# Altium PCB 2009_DFMUX_MEZZANINE_REV4_TIMEMAIL.PCBDOC (part 1 of 6)
Units mil, origin at the board's own origin, x right, y up, seen from the top; angles counter-clockwise.
Board outline 4922.86 x 3627.76 mil, 6 copper layers (Top Layer, Internal Plane 1, Mid-Layer 1, Internal Plane 2, Mid-Layer 2, Bottom Layer); 519 components, 606 nets, 2175 pads, 757 vias.
Unrouted connection lines stored in the file: 148.
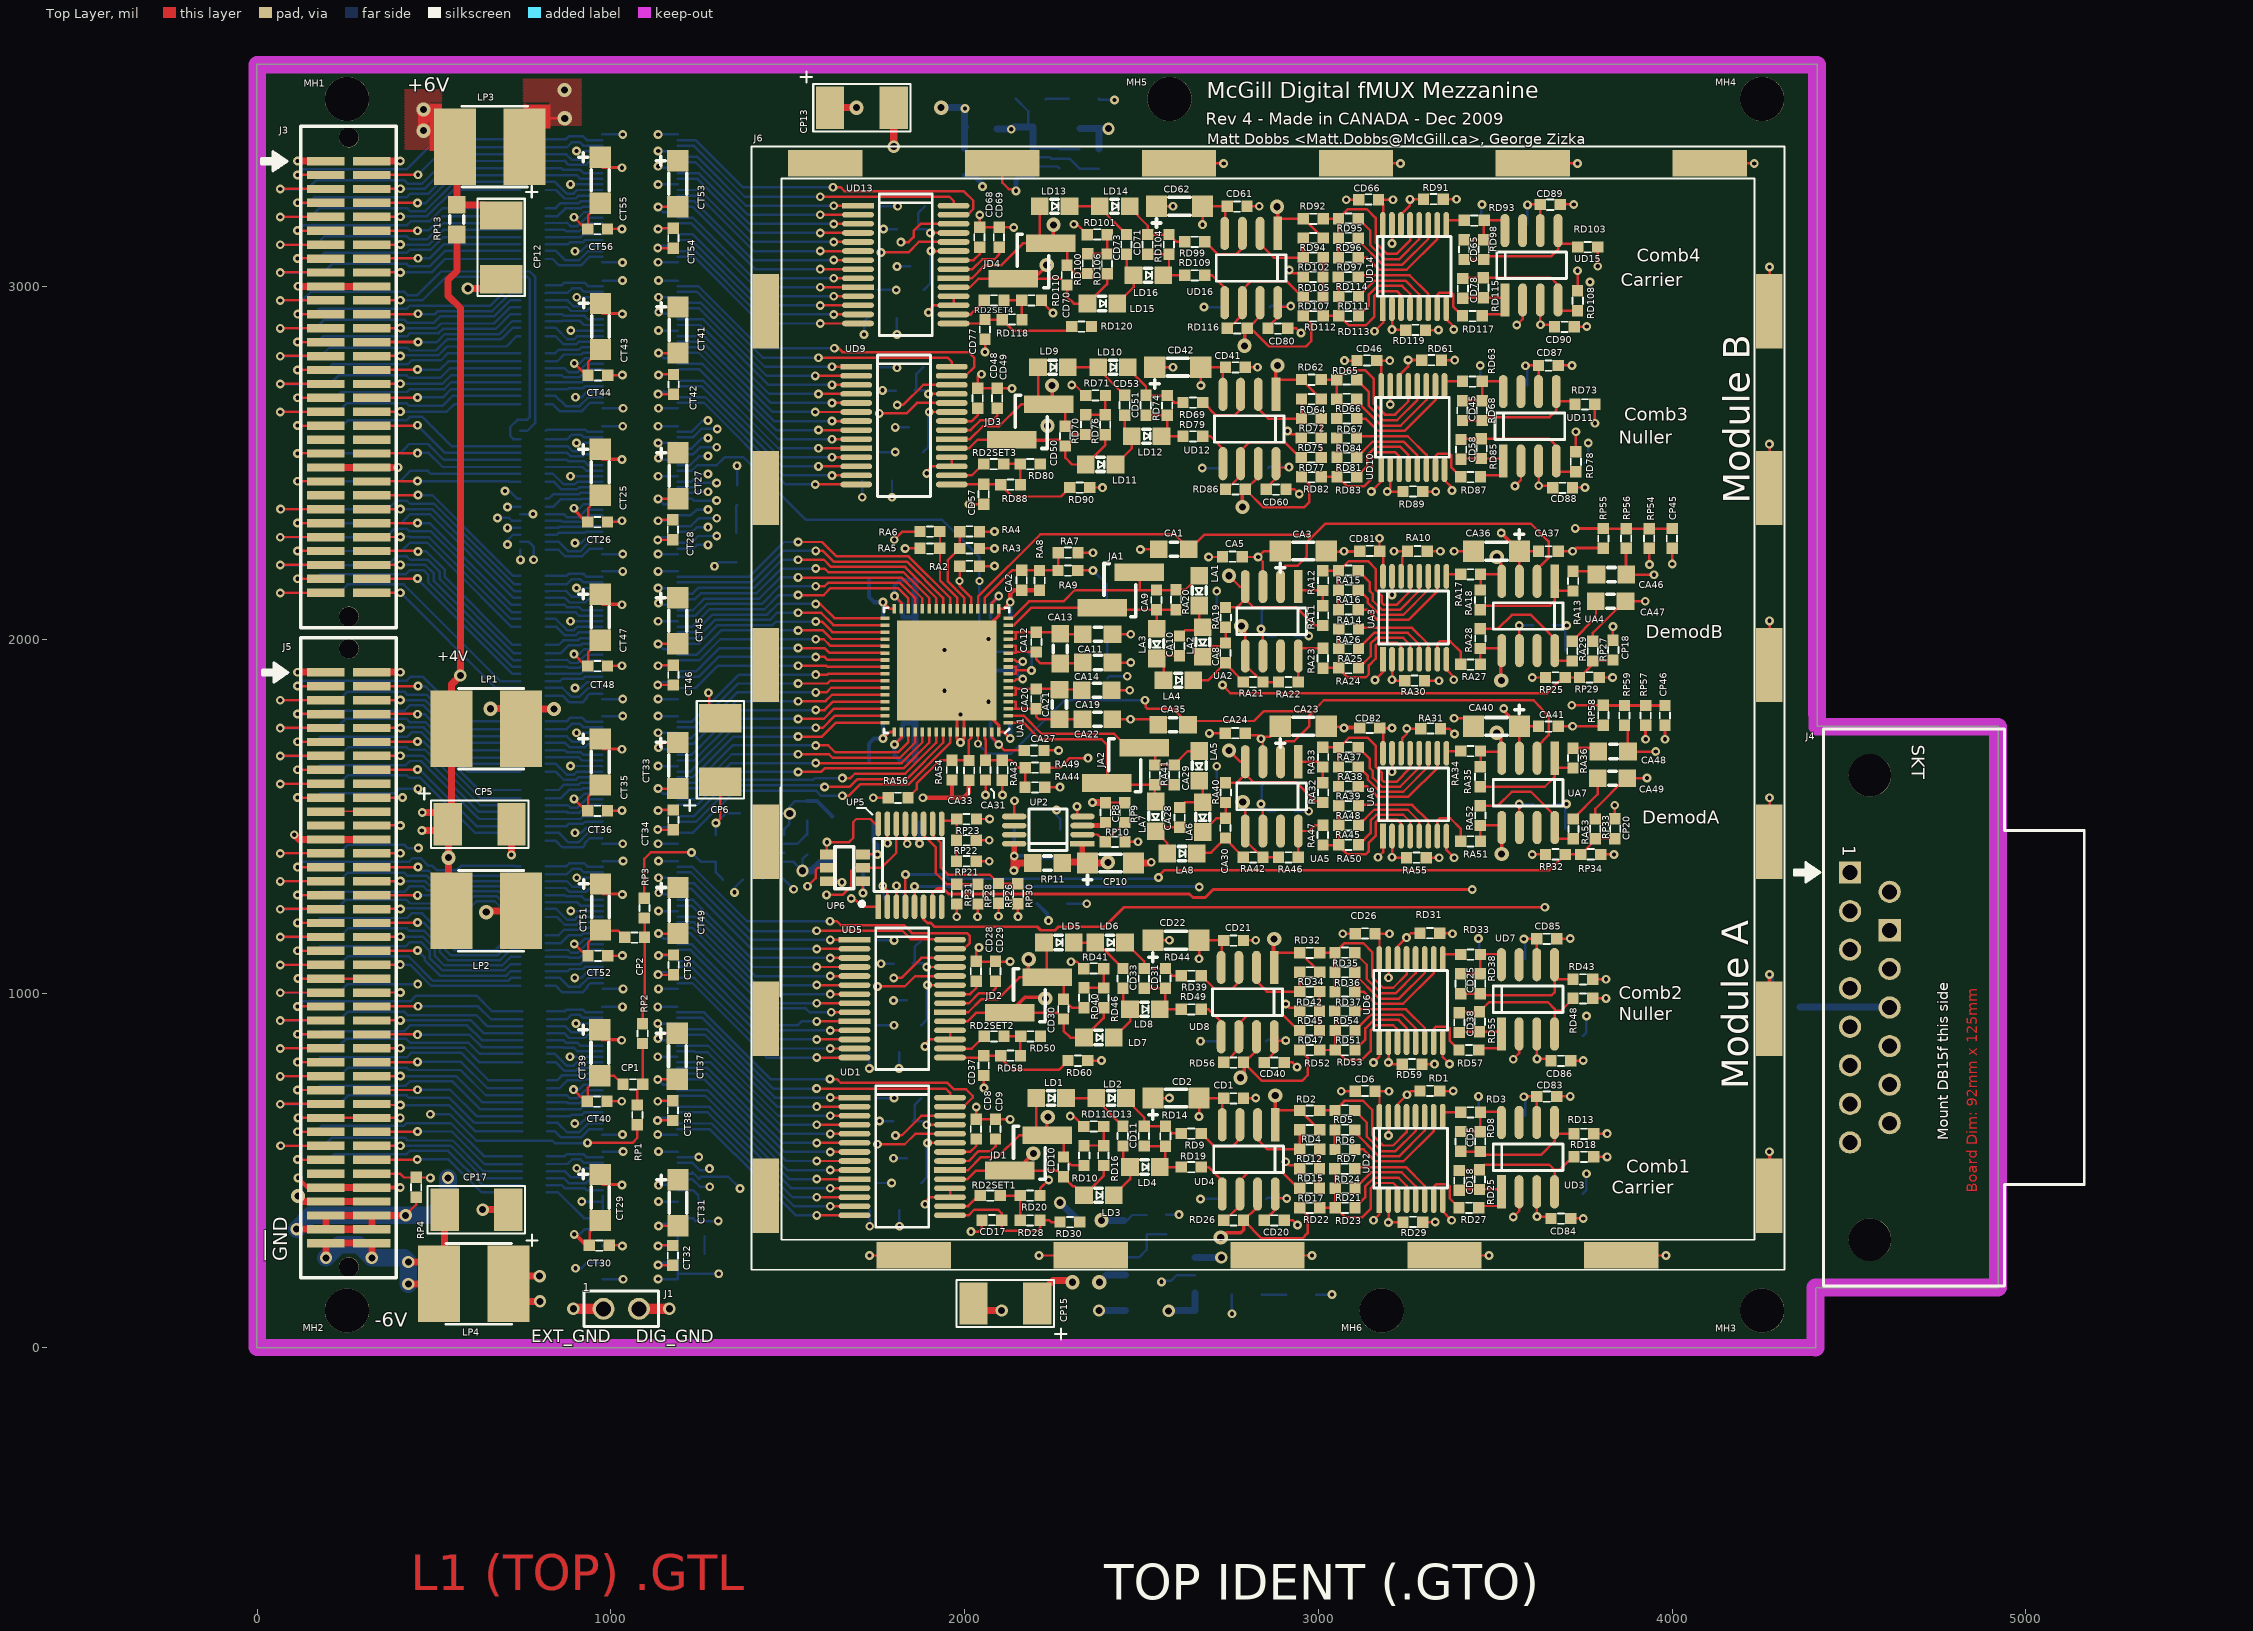
[diagram p0: Top Layer view]
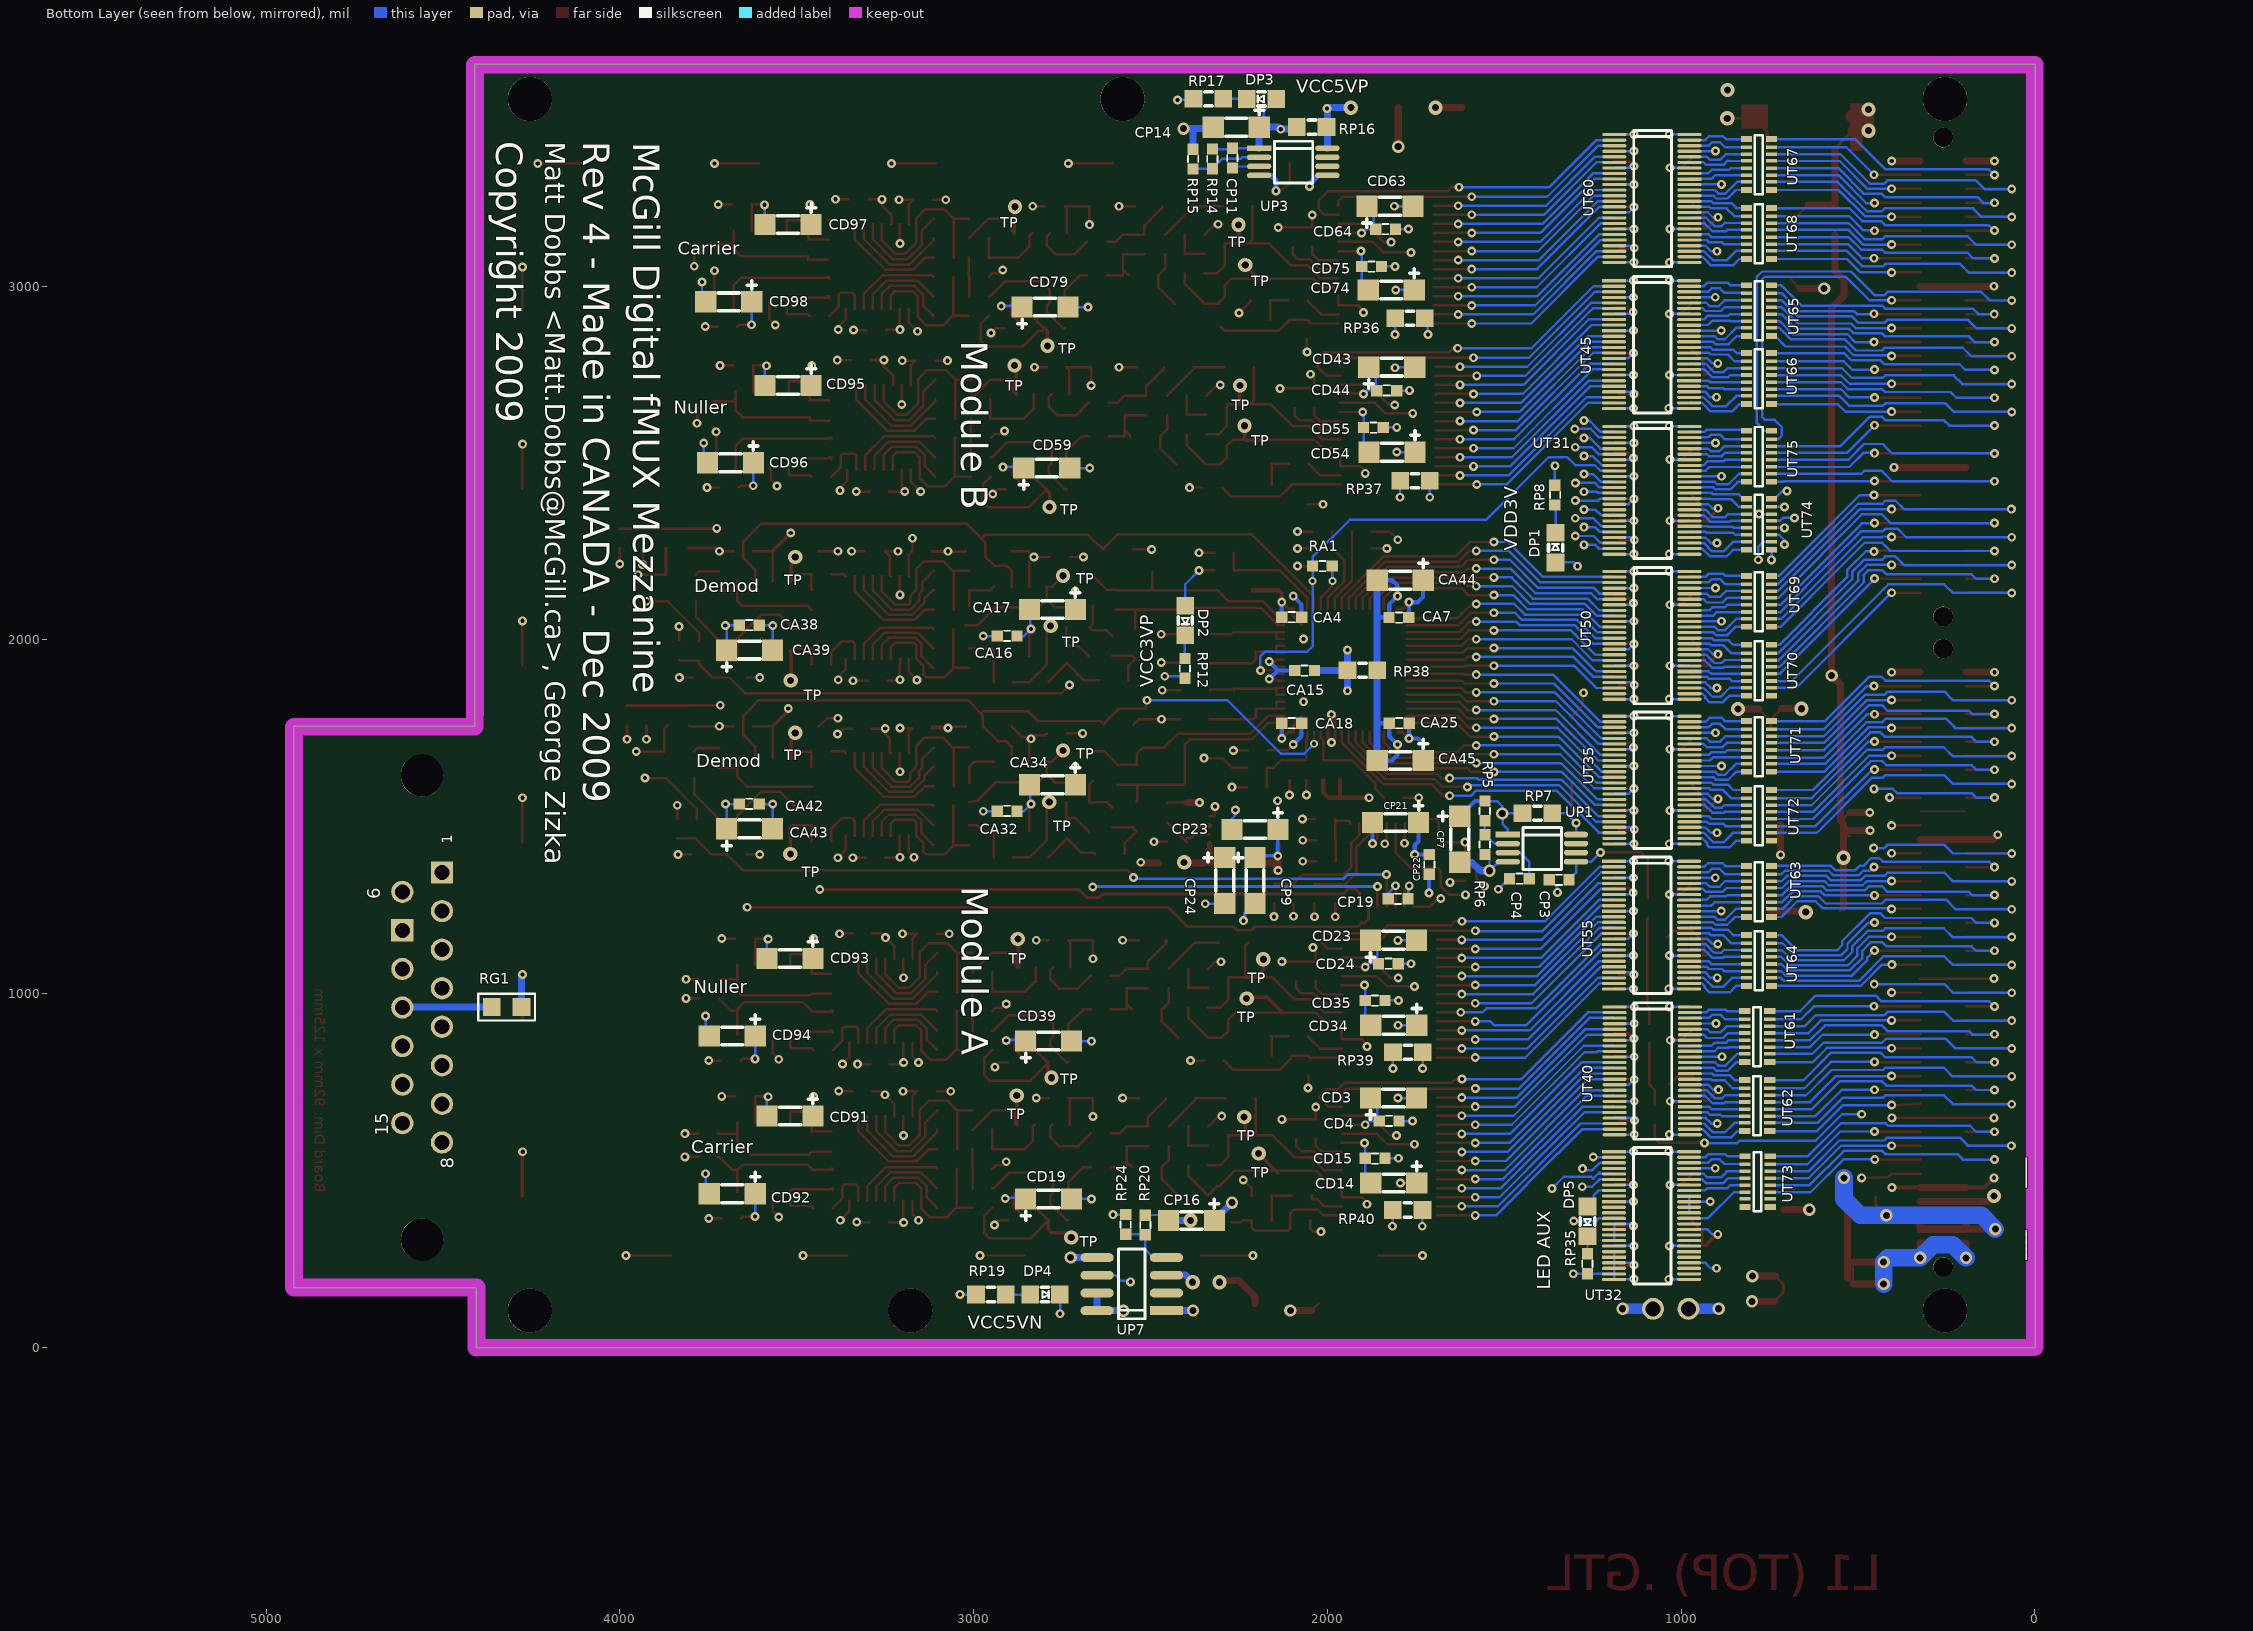
[diagram p1: Bottom Layer view, seen from below]
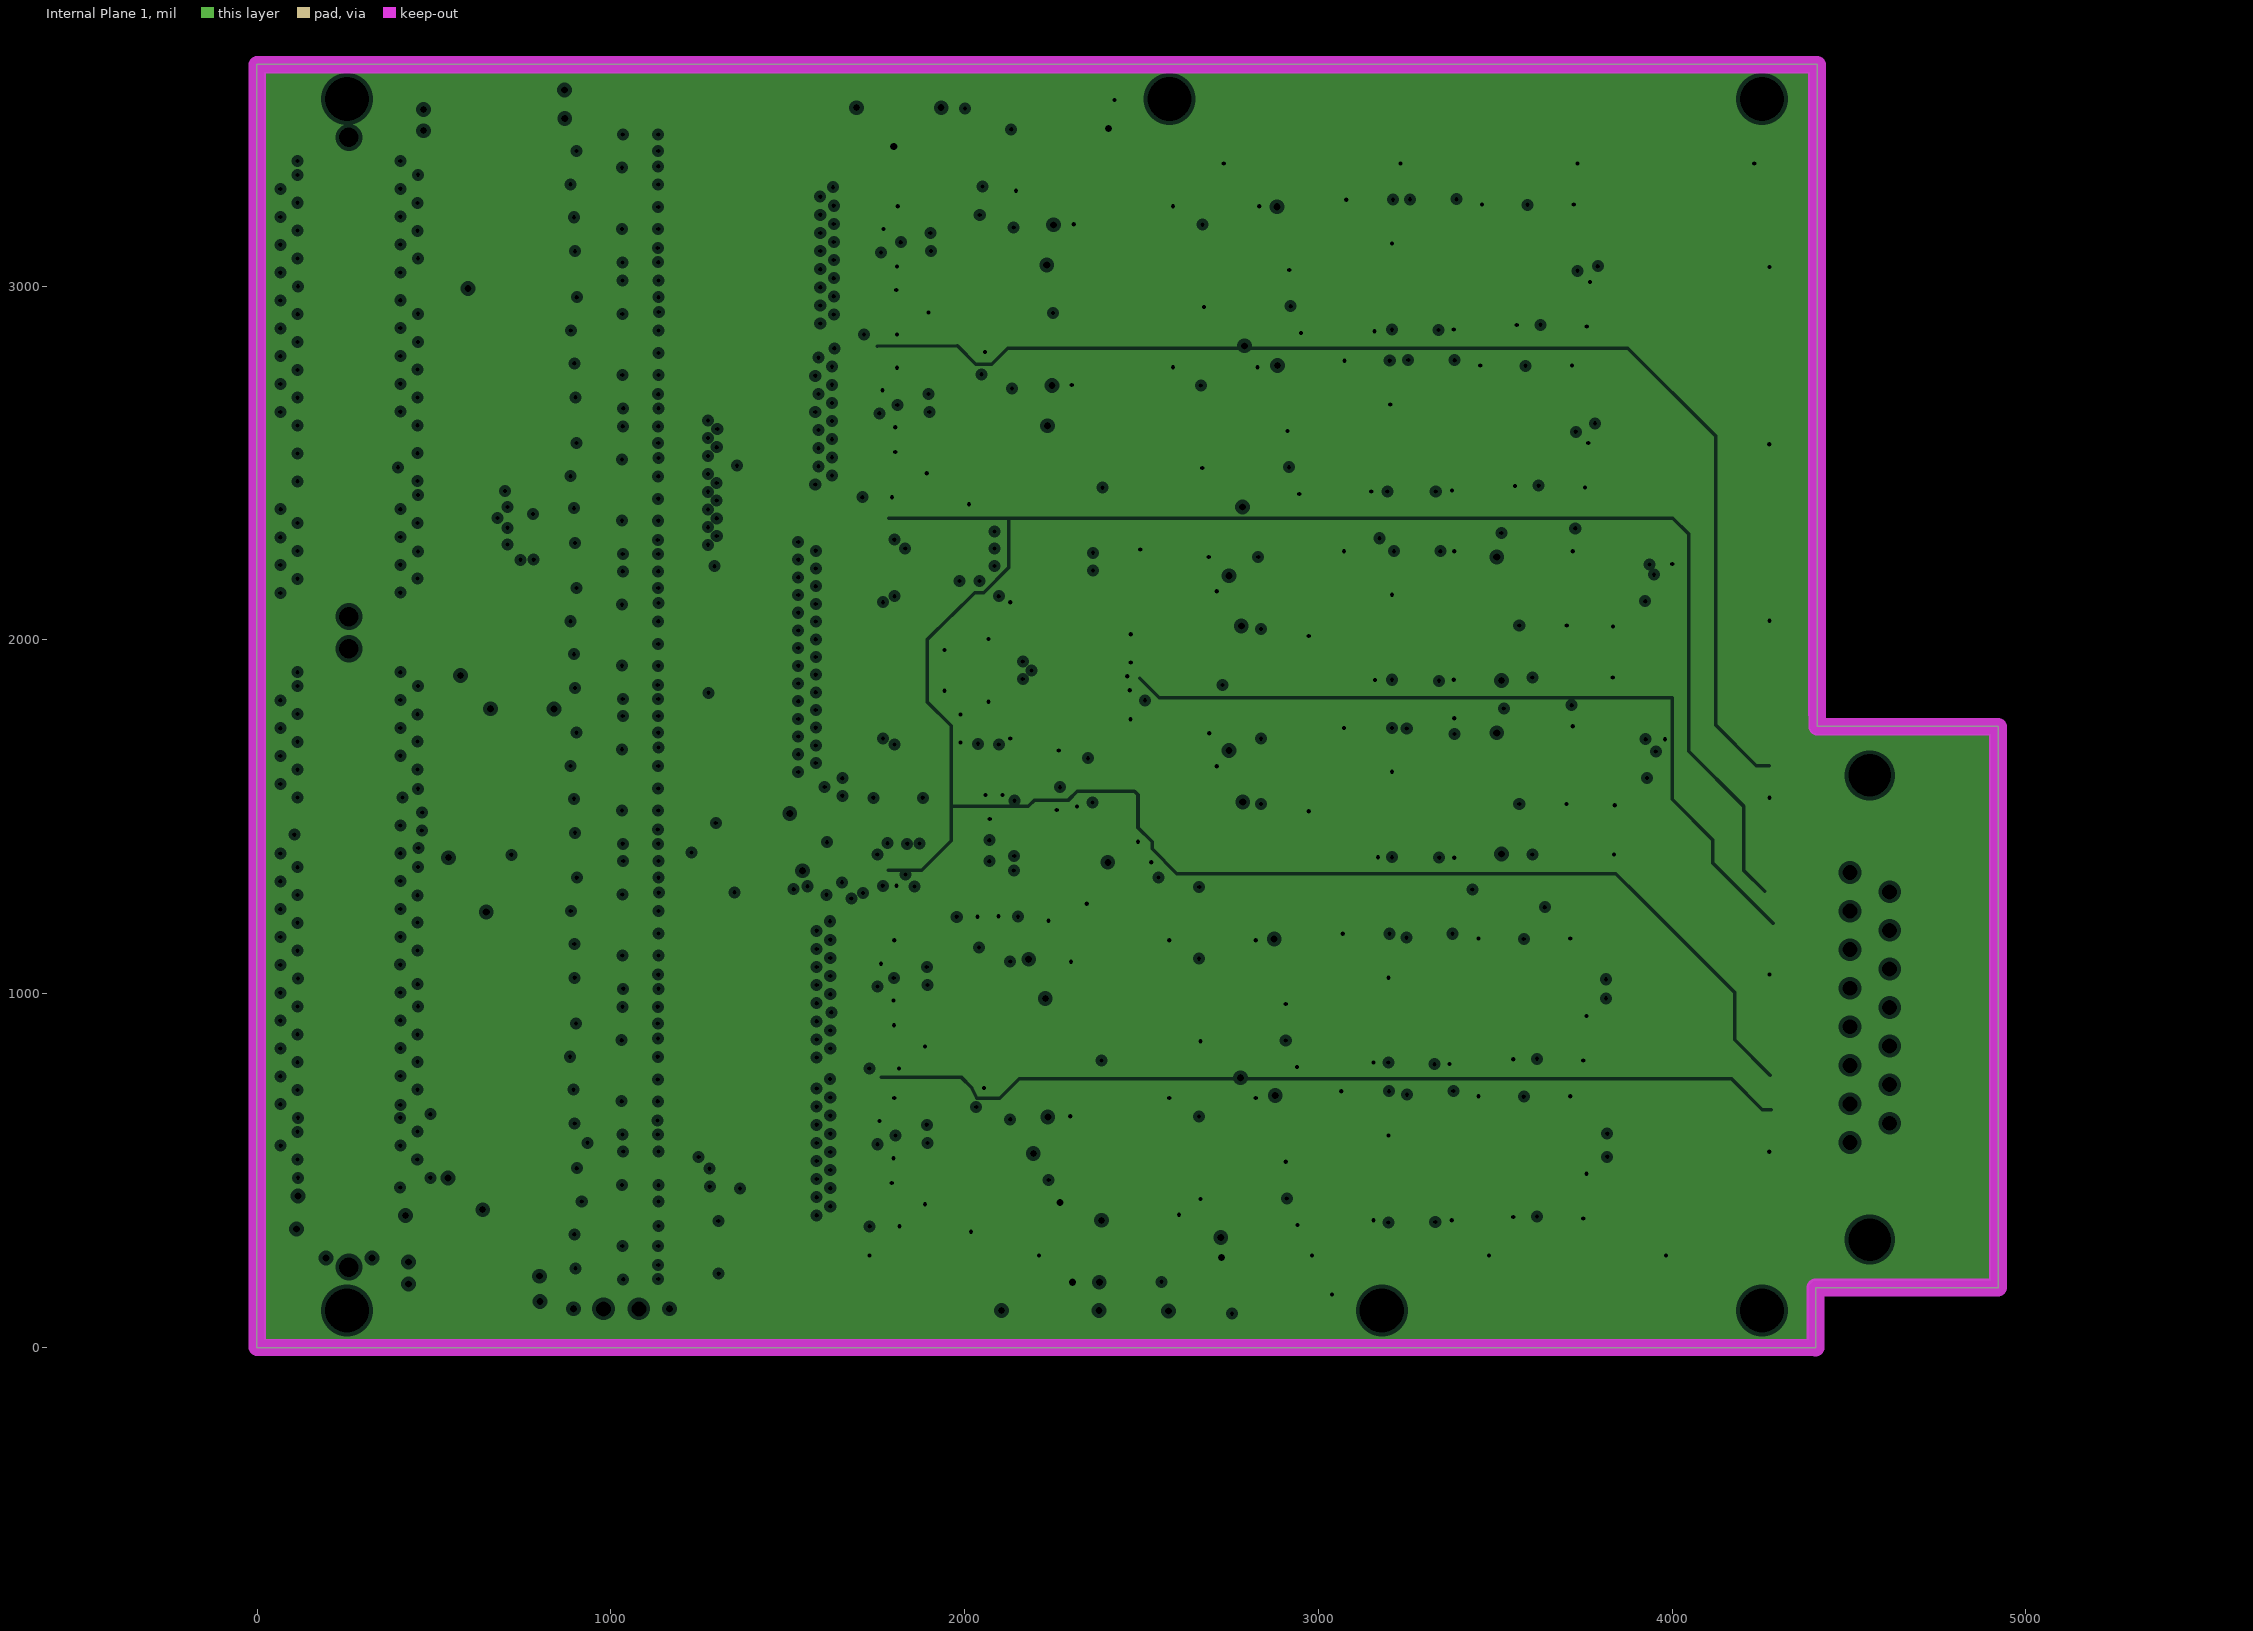
[diagram p2: Internal Plane 1, clearances drawn from the general rule]
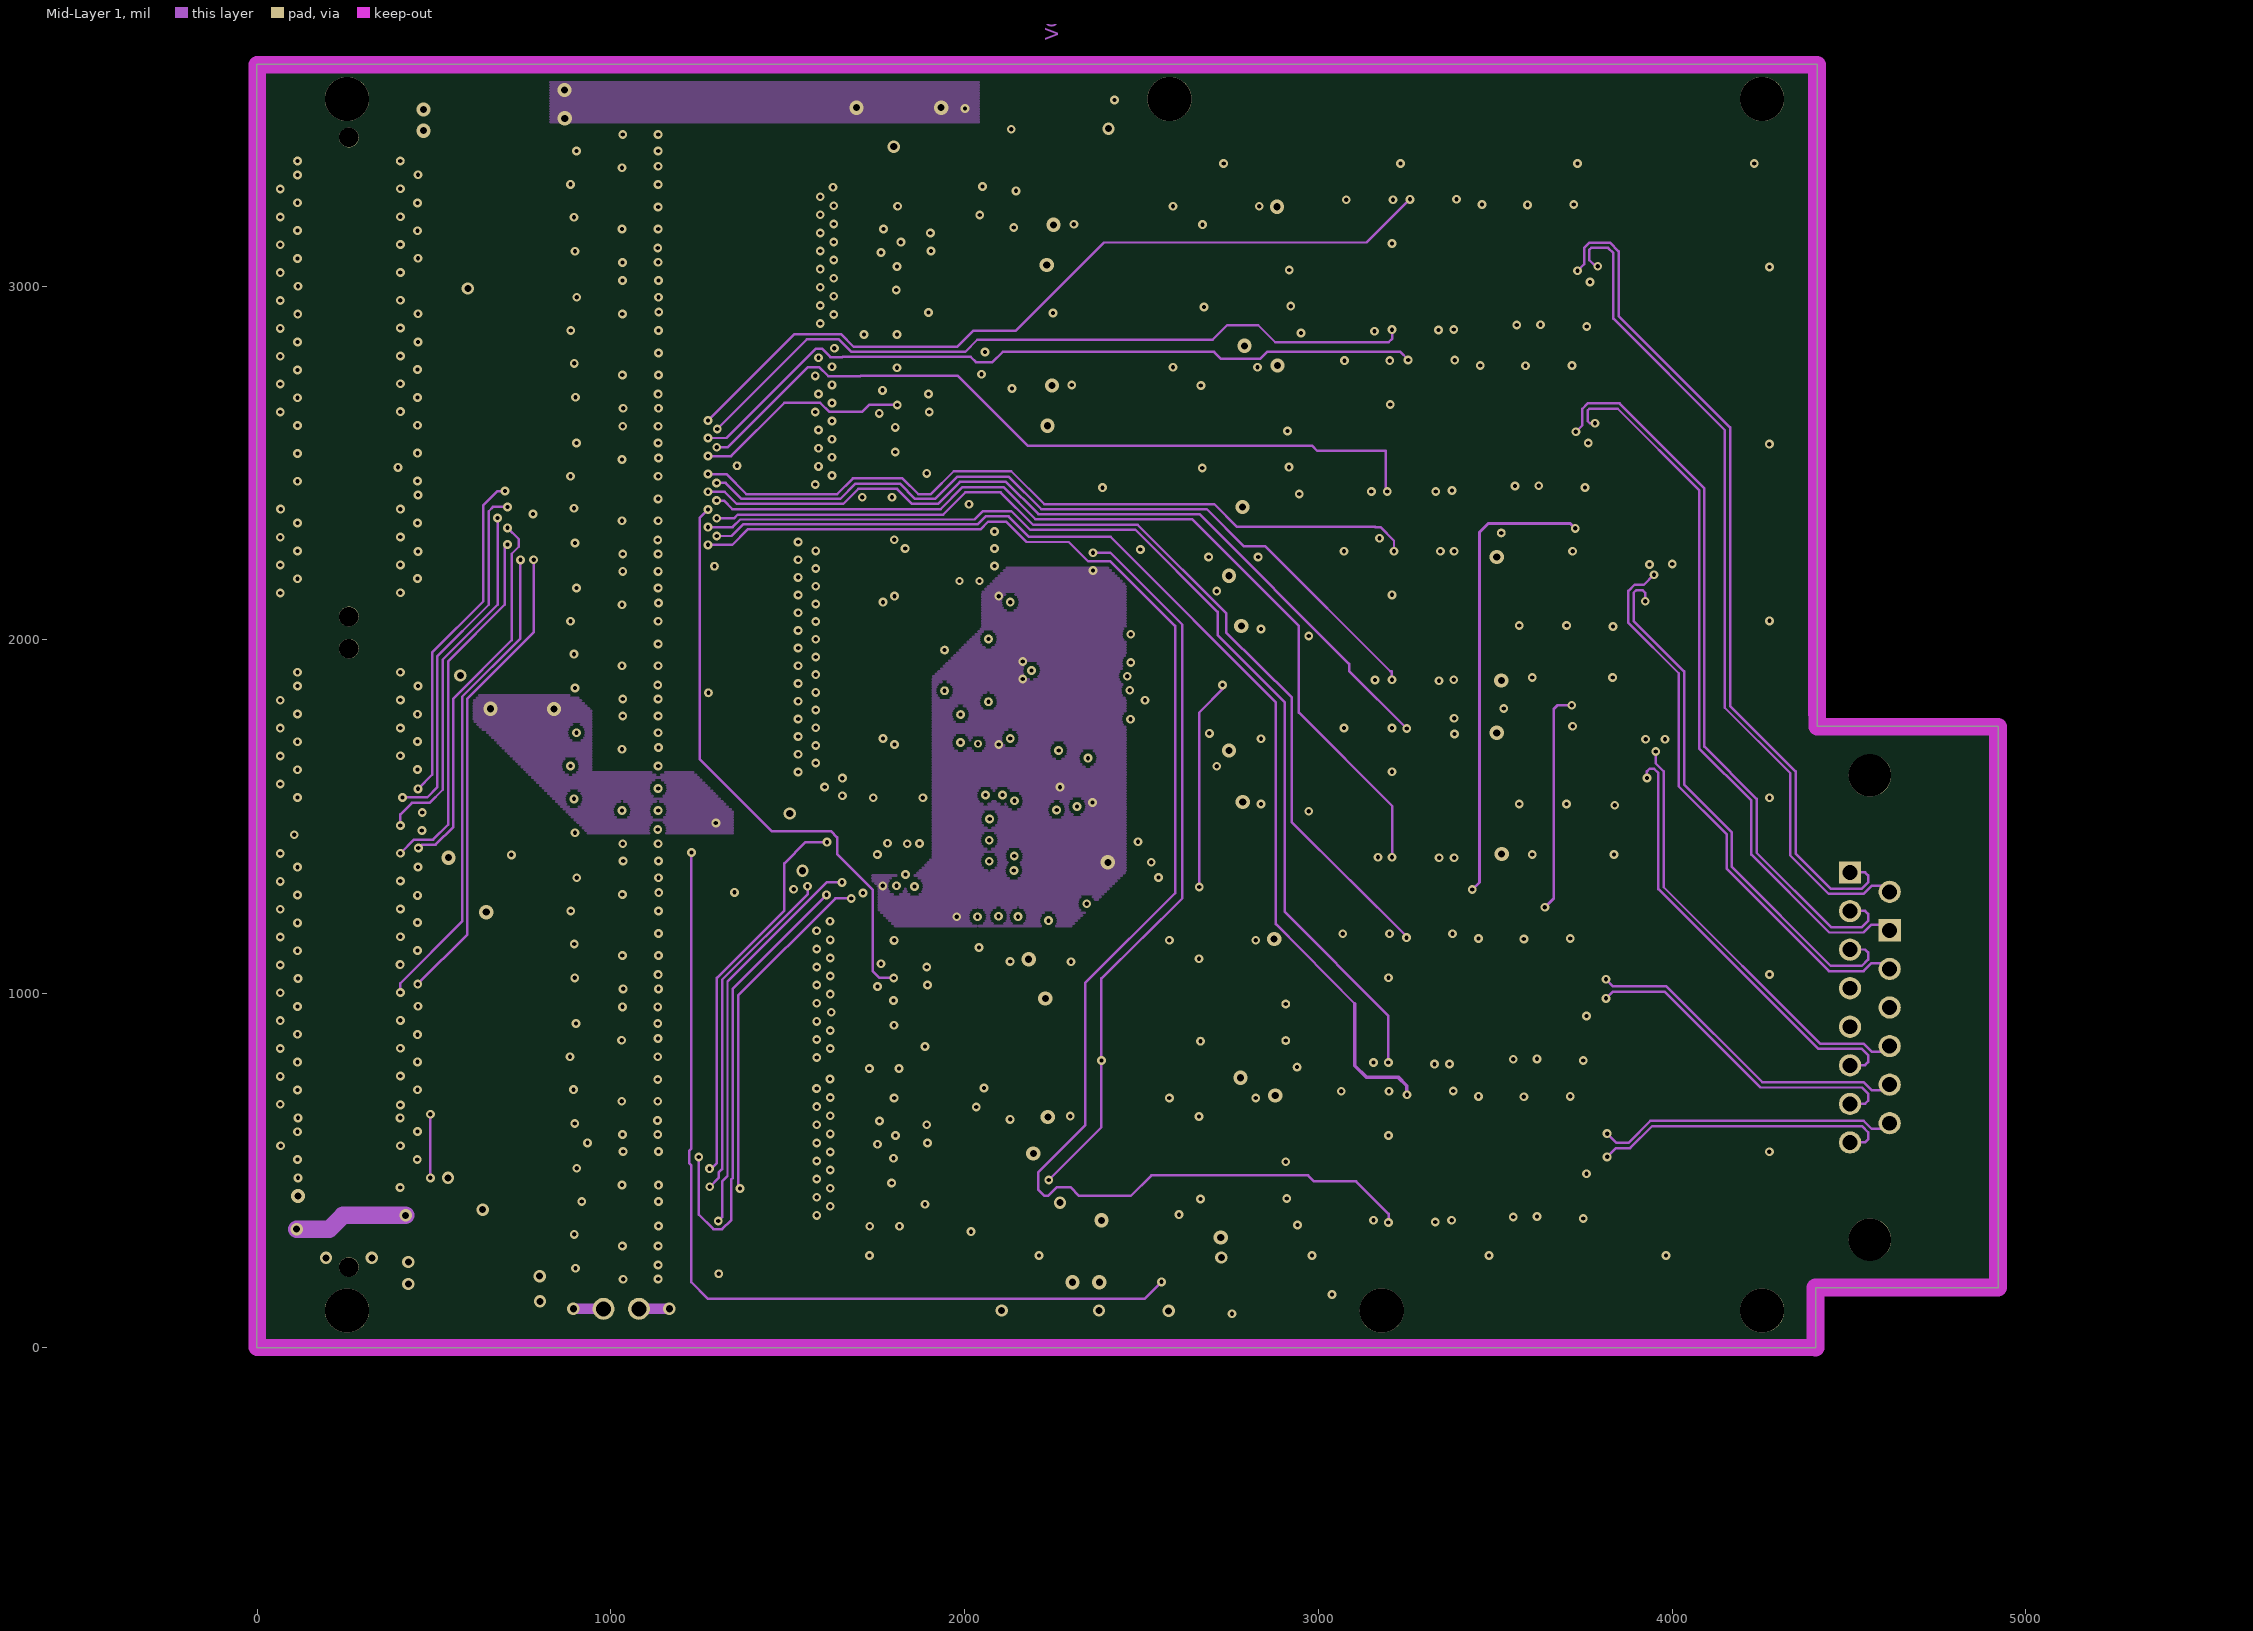
[diagram p3: Mid-Layer 1]
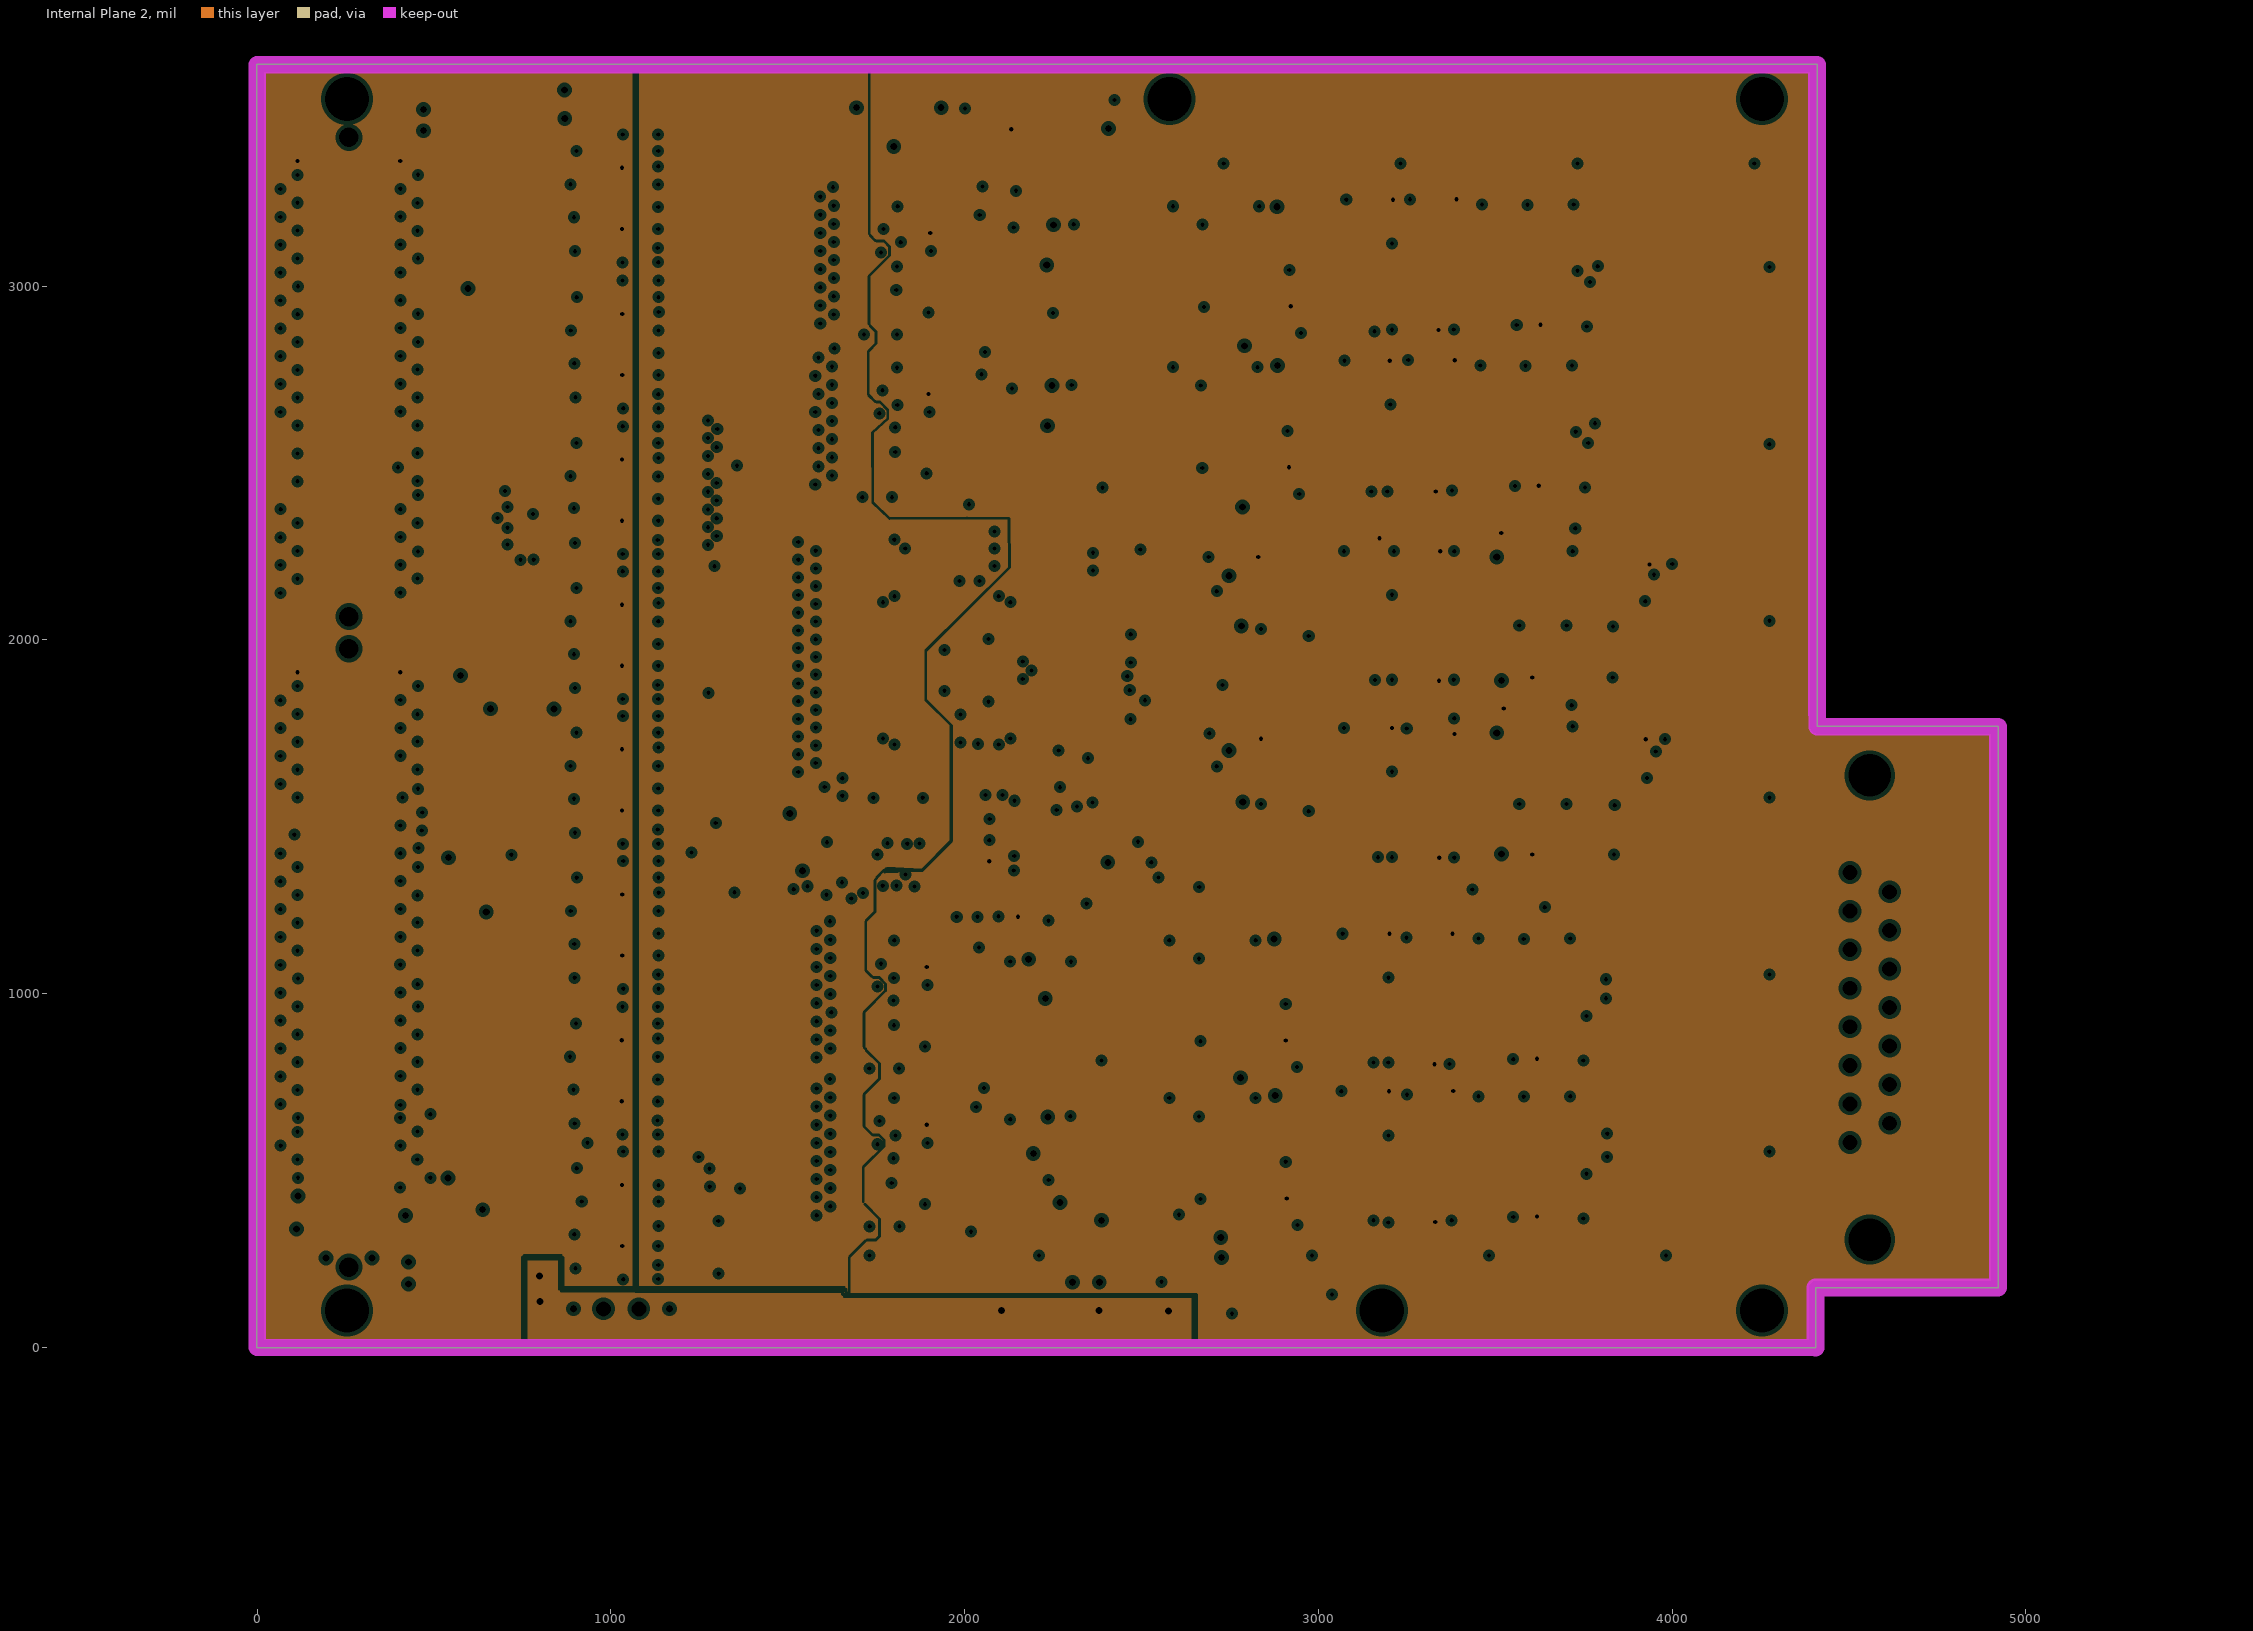
[diagram p4: Internal Plane 2, clearances drawn from the general rule]
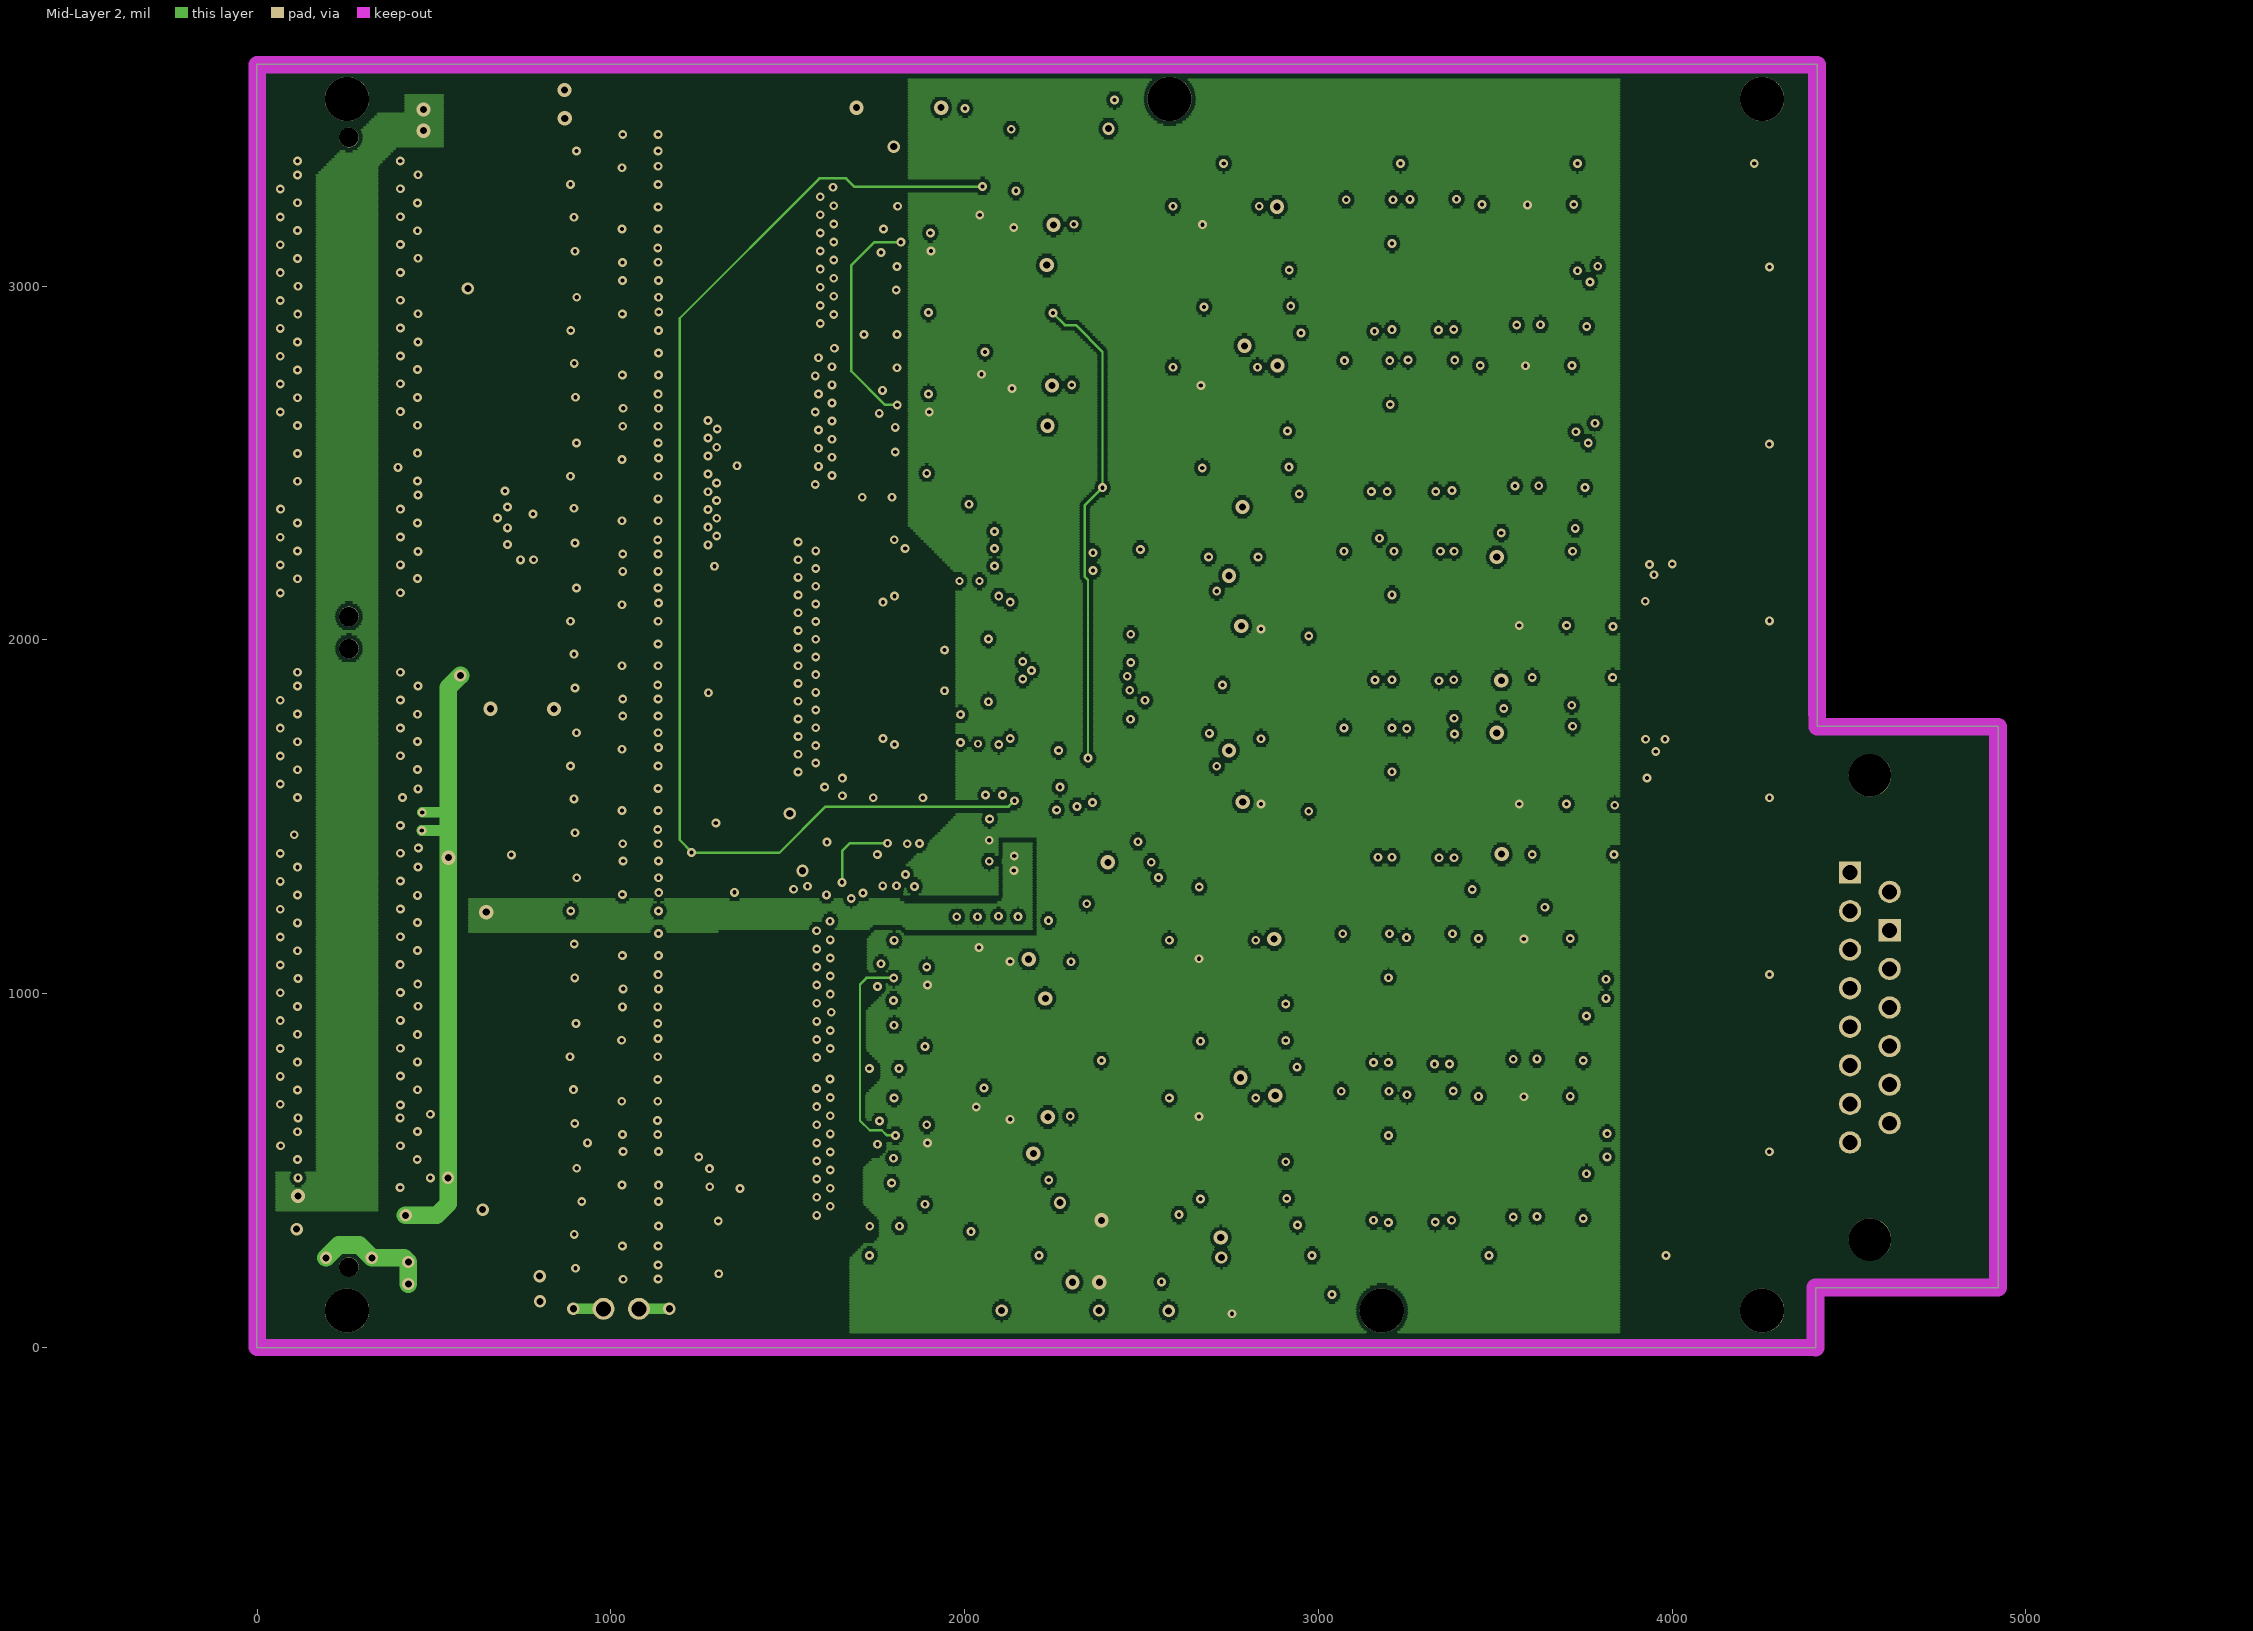
[diagram p5: Mid-Layer 2]

## Layer stack, top to bottom
Top Layer: signal copper 1.4
Dielectric: core 12.6, FR-4, Dk 4.8
Internal Plane 1: plane copper 1.4, net GND_SIGNAL
Dielectric: prepreg 12.6, FR-4, Dk 4.8
Mid-Layer 1: signal copper 1.4
Dielectric: core 12.6, FR-4, Dk 4.8
Internal Plane 2: plane copper 1.4, net VDD_EXT
Dielectric: prepreg 12.6, FR-4, Dk 4.8
Mid-Layer 2: signal copper 1.4
Dielectric: core 12.6, FR-4, Dk 4.8
Bottom Layer: signal copper 1.4

## Board outline
0,-1.02 cw(c0,0) -1.01,0 -1.01,3625.73 cw(c0,3625.73) 0,3626.75 4409.07,3626.75 cw(c4409.07,3625.73) 4410.08,3625.73 4410.08,1755.02 4920.83,1755.02 cw(c4920.83,1754) 4921.85,1754 4921.85,169 cw(c4920.83,169) 4920.83,167.98 4406.02,167.98 4406.02,0 cw(c4405,0) 4405,-1.02

## Design rules (kind name [scope] priority, off if disabled: settings)
Clearance Clearance_1 [(InPoly)] p1: gap=10
Clearance [All] p2: gap=6
ComponentClearance [All] p1 off: gap=10 collisioncheckmode=3 verticalgap=10 showdistances=FALSE
FabricationTestPointUsage TestPointUsage [All] p1: valid=0 allowmultiple=FALSE
FabricationTestpoint Testpoint [All] p1: side=3 testpointundercomponent=TRUE minsize=40 maxsize=100 preferedsize=60 minholesize=20 maxholesize=40 preferedholesize=32 testpointgrid=1 allowsidetop=TRUE allowsidebottom=TRUE usegrid=TRUE gridtolerance=0.01
HoleSize [All] p1: absolutevalues=TRUE maxlimit=250 minlimit=10 maxpercent=80.000 minpercent=20.000
PlaneClearance [All] p1: clearance=11
PlaneConnect PlaneConnect_1 [All] p1: planeconnectstyle=Direct reliefexpansion=20 reliefentries=4 reliefconductorwidth=10 reliefairgap=10
PlaneConnect [All] p2: planeconnectstyle=Relief reliefexpansion=20 reliefentries=4 reliefconductorwidth=10 reliefairgap=12
PolygonConnect [All] p1: connectstyle=Relief reliefconductorwidth=10 reliefentries=4 polygonreliefangle="90 Angle"
RoutingLayers [All] p1: top layer_v5=TRUE mid layer 1_v5=FALSE mid layer 2_v5=FALSE bottom layer_v5=TRUE
RoutingVias [All] p1: holewidth=12 width=25 viastyle="Through Hole" minholewidth=12 minwidth=22 maxholewidth=28 maxwidth=50
SilkscreenOverComponentPads [All] p1: minsilkscreentomaskgap=10
SolderMaskExpansion [All] p1: expansion=4
Width [All] p1: maxlimit=100 minlimit=2 preferedwidth=7
20 further rules are at their usual default settings.

## Classes and differential pairs
component class "Component Group 1": CA1 CA2 CA3 CA4 CA5 CA7 CA8 CA9 CA10 CA11 CA12 CA13 CA14 CA15 CA16 CA17 CA18 CA19 CA20 CA21 CA22 CA23 CA24 CA25 CA27 CA28 CA29 CA30 CA31 CA32 CA33 CA34 CA35 CA36 CA37 CA38 CA39 CA40 CA41 CA42 CA43 CA44 CA45 CA46 CA47 CA48 CA49 CD81 CD82 JA1 JA2 LA1 LA2 LA3 LA4 LA5 LA6 LA7 LA8 RA1 RA2 RA3 RA4 RA5 RA6 RA7 RA8 RA9 RA10 RA11 RA12 RA13 RA14 RA15 RA16 RA17 RA18 RA19 RA20 RA21 RA22 RA23 RA24 RA25 RA26 RA27 RA28 RA29 RA30 RA31 RA32 RA33 RA34 RA35 RA36 RA37 RA38 RA39 RA40 RA41 RA42 RA43 RA44 RA45 RA46 RA47 RA48 RA49 RA50 RA51 RA52 RA53 RA54 RA55 RA56 UA1 UA2 UA3 UA4 UA5 UA6 UA7

## Components (designator, comment, footprint, x,y, rotation, side; value= is the part's Value field where it differs from the comment)
CA1 "2.2u, 0805, X5R" 0805C 2632.63,2255.43 r180 top
CA2 "100n, 0603" 0603C 2161.77,2195.87 r270 top
CA3 "10u A3216 10V LO ESR" TANTA 2892.63,2250.43 r0 top
CA4 "100n, 0603" 0603C 2073,2063.37 r0 bottom
CA5 "100n, 0603" 0603C 2784.63,2234 r180 top
CA7 "100n, 0603" 0603C 1825.27,2063.37 r180 bottom
CA8 "120p, 5%, 0603 NP0" 0603C 2737.63,1990.43 r270 top
CA9 "120p, 5%, 0603 NP0" 0603C 2542.63,2140.43 r270 top
CA10 "200p, 5%, 0603 NP0" 0603C 2607.63,2010.43 r270 top
CA11 "1u, 0805, X5R" 0805C 2417.63,2015.43 r180 top
CA12 "100n, 0603" 0603C 2201.77,1965.87 r90 top
CA13 "2.2u, 0805, X5R" 0805C 2269.63,1933.43 r90 top
CA14 "1u, 0805, X5R" 0805C 2417.63,1935.43 r180 top
CA15 "100n, 0603" 0603C 2091.77,1913.37 r180 bottom
CA16 "100n, 0603" 0603C 2877.63,2010.43 r0 bottom
CA17 "10u A3216 10V LO ESR" TANTA 2712.63,2085.43 r0 bottom
CA18 "100n, 0603" 0603C 2073,1763.91 r0 bottom
CA19 "1u, 0805, X5R" 0805C 2414.63,1857.43 r180 top
CA20 "100n, 0603" 0603C 2201.73,1805.37 r90 top
CA21 "2.2u, 0805, X5R" 0805C 2267.63,1775.43 r90 top
CA22 "1u, 0805, X5R" 0805C 2416.63,1775.43 r180 top
CA23 "10u A3216 10V LO ESR" TANTA 2892.63,1755.43 r0 top
CA24 "100n, 0603" 0603C 2792.63,1735.43 r180 top
CA25 "100n, 0603" 0603C 1769.27,1763.91 r0 bottom
CA27 "100n, 0603" 0603C 2168.63,1687.37 r0 top
CA28 "200p, 5%, 0603 NP0" 0603C_REV1 2607.63,1525.43 r270 top
CA29 "120p, 5%, 0603 NP0" 0603C 2592.63,1645.43 r270 top
CA30 "120p, 5%, 0603 NP0" 0603C 2737.63,1495.43 r270 top
CA31 "100n, 0603" 0603C 2059.27,1659.37 r270 top
CA32 "100n, 0603" 0603C 2877.63,1515.43 r0 bottom
CA33 "100n, 0603" 0603C 2011.77,1603.37 r90 top
CA34 "10u A3216 10V LO ESR" TANTA 2712.63,1590.43 r0 bottom
CA35 "2.2u, 0805, X5R" 0805C 2547.63,1760.43 r0 top
CA36 "10u A3216 10V LO ESR" TANTA 3567.63,2250.43 r180 top
CA37 "100n, 0603" 0603C 3622.63,2250.43 r0 top
CA38 "100n, 0603" 0603C 3606.63,2040.43 r0 bottom
CA39 "10u A3216 10V LO ESR" TANTA 3697.63,1970.43 r180 bottom
CA40 "10u A3216 10V LO ESR" TANTA 3567.63,1755.43 r180 top
CA41 "100n, 0603" 0603C 3622.63,1755.43 r0 top
CA42 "100n, 0603" 0603C 3606.63,1535.43 r0 bottom
CA43 "10u A3216 10V LO ESR" TANTA 3697.63,1465.43 r180 bottom
CA44 "10u A3216 10V LO ESR" TANTA 1729.27,2168.37 r0 bottom
CA45 "10u A3216 10V LO ESR" TANTA 1729.27,1658.91 r0 bottom
CA46 "100n, 0805" 0805C 3869.63,2184 r180 top
CA47 "100n, 0805" 0805C 3784.63,2109 r0 top
CA48 "100n, 0805" 0805C 3874.63,1684 r180 top
CA49 "100n, 0805" 0805C 3789.63,1609 r0 top
CD1 "100n, 0603" 0603C 2732.63,704.43 r0 top
CD2 "10u A3216 10V LO ESR" TANTA 2532.63,704.43 r0 top
CD3 "10u A3216 10V LO ESR" TANTA 1877.63,704.43 r180 bottom
CD4 "100n, 0603" 0603C 1797.63,639.37 r0 bottom
CD5 "DNL, 0603" 0603C 3402.63,609.43 r270 top
CD6 "100n, 0603" 0603C 3159.63,724 r180 top
CD8 "100n, 0603" 0603C 2032.63,644.43 r270 top
CD9 "100n, 0603" 0603C 2087.63,644.43 r270 top
CD10 "120p, 5%, 0603 NP0" 0603C 2279.63,537.43 r270 top
CD11 "120p, 5%, 0603 NP0" 0603C 2507.63,624.43 r270 top
CD13 "200p, 5%, 0603 NP0" 0603C 2447.63,624.43 r270 top
CD14 "10u A3216 10V LO ESR" TANTA 1747.63,464.43 r0 bottom
CD15 "100n, 0603" 0603C 1892.63,534.43 r180 bottom
CD17 "100n, 0603" 0603C 2104.63,359 r180 top
CD18 "DNL, 0603" 0603C 3397.63,444.43 r90 top
CD19 "10u A3216 10V LO ESR" TANTA 2852.63,419.43 r180 bottom
CD20 "100n, 0603" 0603C 2847.63,359.43 r0 top
CD21 "100n, 0603" 0603C 2732.63,1150.43 r0 top
CD22 "10u A3216 10V LO ESR" TANTA 2532.63,1150.43 r0 top
CD23 "10u A3216 10V LO ESR" TANTA 1877.63,1150.43 r180 bottom
CD24 "100n, 0603" 0603C 1799.63,1084 r0 bottom
CD25 "DNL, 0603" 0603C 3402.63,1055.43 r270 top
CD26 "100n, 0603" 0603C 3159.63,1169 r180 top
CD28 "100n, 0603" 0603C 2032.63,1090.43 r270 top
CD29 "100n, 0603" 0603C 2087.63,1090.43 r270 top
CD30 "120p, 5%, 0603 NP0" 0603C 2279.63,983.43 r270 top
CD31 "120p, 5%, 0603 NP0" 0603C 2507.63,1070.43 r270 top
CD33 "200p, 5%, 0603 NP0" 0603C 2447.63,1070.43 r270 top
CD34 "10u A3216 10V LO ESR" TANTA 1747.63,910.43 r0 bottom
CD35 "100n, 0603" 0603C 1892.63,980.43 r180 bottom
CD37 "100n, 0603" 0603C 2054.63,824 r270 top
CD38 "DNL, 0603" 0603C 3397.63,890.43 r90 top
CD39 "10u A3216 10V LO ESR" TANTA 2852.63,865.43 r180 bottom
CD40 "100n, 0603" 0603C 2847.63,805.43 r0 top
CD41 "100n, 0603" 0603C 2737.63,2770.43 r0 top
CD42 "10u A3216 10V LO ESR" TANTA 2537.63,2770.43 r0 top
CD43 "10u A3216 10V LO ESR" TANTA 1882.63,2770.43 r180 bottom
CD44 "100n, 0603" 0603C 1804.63,2704 r0 bottom
CD45 "DNL, 0603" 0603C 3407.63,2675.43 r270 top
CD46 "100n, 0603" 0603C 3164.63,2789 r180 top
CD48 "100n, 0603" 0603C 2037.63,2710.43 r270 top
CD49 "100n, 0603" 0603C 2092.63,2710.43 r270 top
CD50 "120p, 5%, 0603 NP0" 0603C 2284.63,2603.43 r270 top
CD51 "120p, 5%, 0603 NP0" 0603C 2512.63,2690.43 r270 top
CD53 "200p, 5%, 0603 NP0" 0603C 2452.63,2690.43 r270 top
CD54 "10u A3216 10V LO ESR" TANTA 1752.63,2530.43 r0 bottom
CD55 "100n, 0603" 0603C 1897.63,2600.43 r180 bottom
CD57 "100n, 0603" 0603C 2054.63,2439 r270 top
CD58 "DNL, 0603" 0603C 3402.63,2510.43 r90 top
CD59 "10u A3216 10V LO ESR" TANTA 2857.63,2485.43 r180 bottom
CD60 "100n, 0603" 0603C 2852.63,2425.43 r0 top
CD61 "100n, 0603" 0603C 2742.63,3225.43 r0 top
CD62 "10u A3216 10V LO ESR" TANTA 2542.63,3225.43 r0 top
CD63 "10u A3216 10V LO ESR" TANTA 1887.63,3225.43 r180 bottom
CD64 "100n, 0603" 0603C 1807.63,3160.37 r0 bottom
CD65 "DNL, 0603" 0603C 3412.63,3130.43 r270 top
CD66 "100n, 0603" 0603C 3169.63,3244 r180 top
CD68 "100n, 0603" 0603C 2042.63,3165.43 r270 top
CD69 "100n, 0603" 0603C 2097.63,3165.43 r270 top
CD70 "120p, 5%, 0603 NP0" 0603C 2289.63,3058.43 r270 top
CD71 "120p, 5%, 0603 NP0" 0603C 2517.63,3145.43 r270 top
CD73 "200p, 5%, 0603 NP0" 0603C 2457.63,3145.43 r270 top
CD74 "10u A3216 10V LO ESR" TANTA 1754.63,2989 r0 bottom
CD75 "100n, 0603" 0603C 1902.63,3055.43 r180 bottom
CD77 "100n, 0603" 0603C 2057.63,2905 r270 top
CD78 "DNL, 0603" 0603C 3407.63,2965.43 r90 top
CD79 "10u A3216 10V LO ESR" TANTA 2862.63,2940.43 r180 bottom
CD80 "100n, 0603" 0603C 2857.63,2880.43 r0 top
CD81 "100n, 0603" 0603C 3172.63,2250.43 r180 top
CD82 "100n, 0603" 0603C 3172.63,1750.43 r180 top
CD83 "100n, 0603" 0603C 3617.63,709.43 r0 top
CD84 "100n, 0603" 0603C 3657.63,364.43 r0 top
CD85 "100n, 0603" 0603C 3617.63,1155.43 r0 top
CD86 "100n, 0603" 0603C 3657.63,810.43 r0 top
CD87 "100n, 0603" 0603C 3622.63,2775.43 r0 top
CD88 "100n, 0603" 0603C 3662.63,2430.43 r0 top
CD89 "100n, 0603" 0603C 3627.63,3230.43 r0 top
CD90 "100n, 0603" 0603C 3667.63,2885.43 r0 top
CD91 "10u A3216 10V LO ESR" TANTA 3454.63,654 r0 bottom
CD92 "10u A3216 10V LO ESR" TANTA 3617.63,434.43 r0 bottom
CD93 "10u A3216 10V LO ESR" TANTA 3454.63,1099 r0 bottom
CD94 "10u A3216 10V LO ESR" TANTA 3617.63,880.43 r0 bottom
CD95 "10u A3216 10V LO ESR" TANTA 3459.63,2719 r0 bottom
CD96 "10u A3216 10V LO ESR" TANTA 3622.63,2500.43 r0 bottom
CD97 "10u A3216 10V LO ESR" TANTA 3459.63,3174 r0 bottom
CD98 "10u A3216 10V LO ESR" TANTA 3627.63,2955.43 r0 bottom
CP1 "100n 0603" 0603C 1034.63,744 r0 top
CP2 "100n 0603" 0603C 1039.63,1159 r0 top
CP3 "100n 0603" 0603C 1372.63,1322 r180 bottom
CP4 "10n 0603" 0603C 1429.63,1324 r0 bottom
CP5 "33u, 16V, 20%, 4532C, X5R" TANT4532 539.63,1478.37 r0 top
CP6 "33u, 16V, 20%, 4532C, X5R" TANT4532 1309.63,1599 r90 top
CP7 "10u A3216 10V LO ESR" TANTA 1625.93,1500.8 r270 bottom
CP8 "10n 0603" 0603C 2397.63,1484 r90 top
CP9 "33u, 16V, 20%, 4532C, X5R" TANTA 2205,1384 r270 bottom
CP10 "10u A3216 10V LO ESR" TANTA 2347.63,1369 r0 top
CP11 "10n 0603" 0603C 2267.63,3389 r270 bottom
CP12 "33u, 16V, 20%, 4532C, X5R" TANT4532 689.63,3199 r270 top
CP13 "33u, 16V, 20%, 4532C, X5R" TANT4532 1619.63,3504 r0 top
CP14 "10u A3216 10V LO ESR" TANTA 2192.63,3449 r0 bottom
CP15 "33u, 16V, 20%, 4532C, X5R" TANT4532 2204.63,124 r180 top
CP16 "10u A3216 10V LO ESR" TANTA 2319.63,359 r0 bottom
CP17 "33u, 16V, 20%, 4532C, X5R" TANT4532 709.63,389 r180 top
CP18 "100n, 0603" 0603C 3832.63,1943.37 r90 top
CP19 "100n, 0603" 0603C 1827.63,1268.37 r180 bottom
CP20 "100n, 0603" 0603C 3837.63,1438.37 r90 top
CP21 "10u A3216 10V LO ESR" TANTA 1742.63,1483.37 r0 bottom
CP22 "100n, 0603" 0603C 1712.63,1337.37 r90 bottom
CP23 "10uF,3216,low ESR" TANTA 2140,1464 r0 bottom
CP24 "10uF,3216,low ESR" TANTA 2290,1384 r270 bottom
CP45 "100n, 0603" 0603C 4000,2314 r270 top
CP46 "100n, 0603" 0603C 3980,1814 r270 top
CT25 "10u A3216 10V LO ESR" TANTA 969.63,2538.37 r270 top
CT26 "100n, 0603" 0603C 934.63,2333.37 r0 top
CT27 "10u A3216 10V LO ESR" TANTA 1189.63,2528.37 r270 top
CT28 "100n, 0603" 0603C 1174.63,2283.37 r90 top
CT29 "10u A3216 10V LO ESR" TANTA 969.63,488.37 r270 top
CT30 "100n, 0603" 0603C 939.63,288.37 r0 top
CT31 "10u A3216 10V LO ESR" TANTA 1189.63,473.37 r270 top
CT32 "100n, 0603" 0603C 1174.63,232.37 r90 top
CT33 "10u A3216 10V LO ESR" TANTA 1188.63,1709.37 r270 top
CT34 "100n, 0603" 0603C 1175.63,1463.37 r90 top
CT35 "10u A3216 10V LO ESR" TANTA 969.63,1719.37 r270 top
CT36 "100n, 0603" 0603C 934.63,1517.37 r0 top
CT37 "10u A3216 10V LO ESR" TANTA 1187.63,887.37 r270 top
CT38 "100n, 0603" 0603C 1174.63,641.37 r90 top
CT39 "10u A3216 10V LO ESR" TANTA 968.63,897.37 r270 top
CT40 "100n, 0603" 0603C 933.63,695.37 r0 top
CT41 "10u A3216 10V LO ESR" TANTA 1189.63,2940.37 r270 top
CT42 "100n, 0603" 0603C 1176.63,2694.37 r90 top
CT43 "10u A3216 10V LO ESR" TANTA 970.63,2950.37 r270 top
CT44 "100n, 0603" 0603C 935.63,2748.37 r0 top
CT45 "10u A3216 10V LO ESR" TANTA 1188.63,2118.37 r270 top
CT46 "100n, 0603" 0603C 1175.63,1872.37 r90 top
CT47 "10u A3216 10V LO ESR" TANTA 969.63,2128.37 r270 top
CT48 "100n, 0603" 0603C 934.63,1926.37 r0 top
CT49 "10u A3216 10V LO ESR" TANTA 1189.63,1299.37 r270 top
CT50 "100n, 0603" 0603C 1176.63,1053.37 r90 top
CT51 "10u A3216 10V LO ESR" TANTA 970.63,1309.37 r270 top
CT52 "100n, 0603" 0603C 935.63,1107.37 r0 top
CT53 "10u A3216 10V LO ESR" TANTA 1188.63,3353.37 r270 top
CT54 "100n, 0603" 0603C 1175.63,3107.37 r90 top
CT55 "10u A3216 10V LO ESR" TANTA 969.63,3363.37 r270 top
CT56 "100n, 0603" 0603C 934.63,3161.37 r0 top
DP1 "LED, 0805, Green" 0805L 1354.63,2219 r90 bottom
DP2 "LED, 0805, Green" 0805L 2401.63,2096 r270 bottom
DP3 "LED, 0805, Green" 0805L 2144.63,3529 r0 bottom
DP4 "LED, 0805, Green" 0805L 2839.63,149 r180 bottom
DP5 "LED, 0805, Yellow" 0805L 1264.63,397.37 r270 bottom
J1 "Header SM Amp146128-1" BLKCON.100/VH/TM1SQS/W.100/2 979.63,109 r0 top
J3 "IEEE1386 Amp120527-1 Plug 64pin" CON_AMP_1MM_64PINS 194.63,3353.43 r90 top
J4 "DB15_FEMALE" DSUB/RS.318/TM/15 4502.5,1342.5 r270 top locked
J5 "IEEE1386 Amp120527-2 Plug 84pin" CON_AMP_1MM_84PINS 194.63,1908.37 r90 top
J6 "CONN FLEX 23" "SHIELD 2.75X3.00" 4237.63,3309 r270 top locked
JA1 "Header2, SM, 0.1" HEADER_AMP146128 2494.27,2190.87 r270 top
JA2 "Header2, SM, 0.1" HEADER_AMP146128 2507.63,1695.43 r270 top
JD1 "Header2, SM, 0.1" HEADER_AMP146128 2127.63,499.43 r90 top
JD2 "Header2, SM, 0.1" HEADER_AMP146128 2127.63,945.43 r90 top
JD3 "Header2, SM, 0.1" HEADER_AMP146128 2132.63,2565.43 r90 top
JD4 "Header2, SM, 0.1" HEADER_AMP146128 2137.63,3020.43 r90 top
LA1 "2.7uH, 0805" 0805L 2662.63,2180.43 r270 top
LA2 "2.7uH, 0805" 0805L 2672.63,2035.43 r270 top
LA3 "2.7uH, 0805" 0805L 2542.63,2030.43 r270 top
LA4 "2.7uH, 0805" 0805L 2562.63,1885.43 r0 top
LA5 "2.7uH, 0805" 0805L 2662.63,1685.43 r270 top
LA6 "2.7uH, 0805" 0805L 2672.63,1540.43 r270 top
LA7 "2.7uH, 0805" 0805L 2539.63,1542.43 r270 top
LA8 "2.7uH, 0805" 0805L 2572.63,1395.43 r0 top
LD1 "2.7uH, 0805" 0805L 2202.63,704.43 r0 top
LD2 "2.7uH, 0805" 0805L 2372.63,704.43 r0 top
LD3 "2.7uH, 0805" 0805L 2337.63,429.43 r0 top
LD4 "2.7uH, 0805" 0805L 2467.63,509.43 r0 top
LD5 "2.7uH, 0805" 0805L 2224.63,1144 r0 top
LD6 "2.7uH, 0805" 0805L 2369.63,1144 r0 top
LD7 "2.7uH, 0805" 0805L 2337.63,875.43 r0 top
LD8 "2.7uH, 0805" 0805L 2467.63,955.43 r0 top
LD9 "2.7uH, 0805" 0805L 2207.63,2770.43 r0 top
LD10 "2.7uH, 0805" 0805L 2377.63,2770.43 r0 top
LD11 "2.7uH, 0805" 0805L 2342.63,2495.43 r0 top
LD12 "2.7uH, 0805" 0805L 2472.63,2575.43 r0 top
LD13 "2.7uH, 0805" 0805L 2212.63,3225.43 r0 top
LD14 "2.7uH, 0805" 0805L 2382.63,3225.43 r0 top
LD15 "2.7uH, 0805" 0805L 2347.63,2950.43 r0 top
LD16 "2.7uH, 0805" 0805L 2477.63,3030.43 r0 top
LP1 "68uH, 0.61A, 460mOhm, PM54-680K" CHOKEPM54 549.63,1748.37 r0 top
LP2 "68uH, 0.61A, 460mOhm, PM54-680K" CHOKEPM54 549.63,1233.37 r0 top
LP3 "68uH, 0.61A, 460mOhm, PM54-680K" CHOKEPM54 559.63,3394 r0 top
LP4 "68uH, 0.61A, 460mOhm, PM54-680K" CHOKEPM54 514.63,179 r0 top
MH1 "mounting hole" MTHOLE.125 254.63,3529 r0 top
MH2 "mounting hole" MTHOLE.125 254.63,104 r0 top
MH3 "mounting hole" MTHOLE.125 4254.63,104 r0 top
MH4 "mounting hole" MTHOLE.125 4254.63,3529 r0 top
MH5 "mounting hole" MTHOLE.125 2579.63,3529 r0 top
MH6 "mounting hole" MTHOLE.125 3179.63,104 r0 top
RA1 "DNL, 0603" 0603R 2041.77,2208.37 r180 bottom
RA2 "0, 0603" 0603R 2041.77,2208.37 r180 top
RA3 "0, 0603" 0603R 2041.77,2258.37 r180 top
RA4 "DNL, 0603" 0603R 2041.77,2305.87 r180 top
RA5 "0, 0603" 0603R 1874.27,2258.37 r0 top
RA6 "DNL, 0603" 0603R 1874.27,2305.87 r0 top
RA7 "DNL, 0603" 0603R 2320.27,2245.87 r180 top
RA8 "DNL, 0603" 0603R 2211.77,2139.87 r90 top
RA9 "0, 0603" 0603R 2264.27,2195.87 r0 top
RA10 "10K, 1%, 0603" 0603R 3307.63,2250.43 r180 top
RA11 "806, 1%, 0603" 0603R 3012.63,2040.43 r90 top
RA12 "49.9, 1%, 0603" 0603R 3012.63,2139.43 r90 top
RA13 "49.9, 1%, 0603" 0603R 3719.63,2138 r90 top
RA14 "698, 1%, 0603" 0603R 3112.63,2085.43 r180 top
RA15 "100, 1%, 0603" 0603R 3112.63,2195.43 r180 top
RA16 "301, 1%, 0603" 0603R 3112.63,2140.43 r180 top
RA17 "49.9, 1%, 0603" 0603R 3402.63,2185.43 r0 top
RA18 "100, 1%, 0603" 0603R 3457.63,2140.43 r270 top
RA19 "49.9, 1%, 0603" 0603R 2737.63,2035.43 r90 top
RA20 "100, 1%, 0603" 0603R 2597.63,2085.43 r90 top
RA21 "49.9, 1%, 0603" 0603R 2787.63,1880.43 r0 top
RA22 "806, 1%, 0603" 0603R 2887.63,1880.43 r0 top
RA23 "49.9, 1%, 0603" 0603R 3012.63,1975.43 r270 top
RA24 "100, 1%, 0603" 0603R 3057.63,1920.43 r0 top
RA25 "301, 1%, 0603" 0603R 3057.63,1975.43 r0 top
RA26 "698, 1%, 0603" 0603R 3057.63,2030.43 r0 top
RA27 "49.9, 1%, 0603" 0603R 3402.63,1930.43 r0 top
RA28 "100, 1%, 0603" 0603R 3457.63,1975.43 r90 top
RA29 "49.9, 1%, 0603" 0603R 3717.63,1940.43 r90 top
RA30 "10K, 1%, 0603" 0603R 3299.63,1884 r180 top
RA31 "10K, 1%, 0603" 0603R 3344.63,1749 r180 top
RA32 "806, 1%, 0603" 0603R 3012.63,1540.43 r90 top
RA33 "49.9, 1%, 0603" 0603R 3012.63,1640.43 r90 top
RA34 "49.9, 1%, 0603" 0603R 3402.63,1685.43 r0 top
RA35 "100, 1%, 0603" 0603R 3457.63,1640.43 r270 top
RA36 "49.9, 1%, 0603" 0603R 3719.63,1638 r90 top
RA37 "100, 1%, 0603" 0603R 3112.63,1695.43 r180 top
RA38 "301, 1%, 0603" 0603R 3112.63,1640.43 r180 top
RA39 "698, 1%, 0603" 0603R 3112.63,1585.43 r180 top
RA40 "49.9, 1%, 0603" 0603R 2737.63,1540.43 r90 top
RA41 "100, 1%, 0603" 0603R 2537.63,1590.43 r90 top
RA42 "49.9, 1%, 0603" 0603R 2787.63,1385.43 r0 top
RA43 "DNL, 0603" 0603R 2106.77,1603.37 r90 top
RA44 "0, 0603" 0603R 2170.77,1583.37 r0 top
RA45 "301, 1%, 0603" 0603R 3057.63,1475.43 r0 top
RA46 "806, 1%, 0603" 0603R 2887.63,1385.43 r0 top
RA47 "49.9, 1%, 0603" 0603R 3012.63,1475.43 r270 top
RA48 "698, 1%, 0603" 0603R 3057.63,1530.43 r0 top
RA49 "DNL, 0603" 0603R 2226.77,1638.37 r180 top
RA50 "100, 1%, 0603" 0603R 3057.63,1420.43 r0 top
RA51 "49.9, 1%, 0603" 0603R 3402.63,1430.43 r0 top
RA52 "100, 1%, 0603" 0603R 3457.63,1475.43 r90 top
RA53 "49.9, 1%, 0603" 0603R 3720.63,1437.43 r90 top
RA54 "DNL, 0603" 0603R 1964.27,1659.37 r270 top
RA55 "10K, 1%, 0603" 0603R 3304.63,1384 r180 top
RA56 "0, 0603" 0603R 1784.27,1553.37 r0 top
RD1 "10K, 1%, 0603" 0603R 3342.63,724.43 r180 top
RD2 "49.9, 1%, 0603" 0603R 2947.63,669.43 r0 top
RD2SET1 "2K, 1%, 0603" 0603R 2044.63,429 r0 top
RD2SET2 "2K, 1%, 0603" 0603R 2055.63,879 r0 top
RD2SET3 "2K, 1%, 0603" 0603R 2054.63,2497 r0 top
RD2SET4 "2K, 1%, 0603" 0603R 2055.63,2960 r0 top
RD3 "49.9, 1%, 0603" 0603R 3402.63,664.43 r0 top
RD4 "200, 0603, 1%" 0603R 2947.63,614.43 r0 top
RD5 "100, 1%, 0603" 0603R 3102.63,669.43 r180 top
RD6 "301, 1%, 0603" 0603R 3102.63,614.43 r180 top
RD7 "698, 1%, 0603" 0603R 3102.63,559.43 r180 top
RD8 "806, 1%, 0603" 0603R 3457.63,609.43 r270 top
RD9 "0, 1%, 0603" 0603R 2612.63,604.43 r0 top
RD10 "49.9, 1%, 0603" 0603R 2337.63,514.43 r90 top
RD11 "0, 0603" 0603R 2392.63,624.43 r180 top
RD12 "200, 0603, 1%" 0603R 2947.63,559.43 r0 top
RD13 "25, 1%, 0603" 0603R 3722.63,604 r0 top
RD14 "100, 1%, 0603" 0603R 2567.63,624.43 r270 top
RD15 "DNL, 0603" 0603R 3002.63,504.43 r180 top
RD16 "49.9, 1%, 0603" 0603R 2392.63,569.43 r270 top
RD17 "200, 0603, 1%" 0603R 3002.63,449.43 r180 top
RD18 "25, 1%, 0603" 0603R 3722.63,538.37 r0 top
RD19 "0, 1%, 0603" 0603R 2612.63,509.43 r0 top
RD20 "DNL, 0603" 0603R 2157.13,429 r0 top
RD21 "301, 1%, 0603" 0603R 3047.63,449.43 r0 top
RD22 "49.9, 1%, 0603" 0603R 2947.63,394.43 r0 top
RD23 "100, 1%, 0603" 0603R 3047.63,394.43 r0 top
RD24 "698, 1%, 0603" 0603R 3046.63,504.43 r0 top
RD25 "806, 1%, 0603" 0603R 3455.63,446.43 r90 top
RD26 "200, 0603, 1%" 0603R 2732.63,359.43 r0 top
RD27 "49.9, 1%, 0603" 0603R 3397.63,394.43 r0 top
RD28 "0, 1%, 0603" 0603R 2157.13,359 r0 top
RD29 "10K, 1%, 0603" 0603R 3294.63,354 r180 top
RD30 "DNL, 0603" 0603R 2269.63,354 r0 top
RD31 "10K, 1%, 0603" 0603R 3342.63,1170.43 r180 top
RD32 "49.9, 1%, 0603" 0603R 2947.63,1115.43 r0 top
RD33 "49.9, 1%, 0603" 0603R 3402.63,1110.43 r0 top
RD34 "200, 0603, 1%" 0603R 2947.63,1060.43 r0 top
RD35 "100, 1%, 0603" 0603R 3102.63,1115.43 r180 top
RD36 "301, 1%, 0603" 0603R 3102.63,1060.43 r180 top
RD37 "698, 1%, 0603" 0603R 3102.63,1005.43 r180 top
RD38 "806, 1%, 0603" 0603R 3457.63,1055.43 r270 top
RD39 "0, 1%, 0603" 0603R 2612.63,1050.43 r0 top
RD40 "49.9, 1%, 0603" 0603R 2337.63,960.43 r90 top
RD41 "0, 0603" 0603R 2392.63,1070.43 r180 top
RD42 "200, 0603, 1%" 0603R 2947.63,1005.43 r0 top
RD43 "25, 1%, 0603" 0603R 3719.63,1040.37 r0 top
RD44 "100, 1%, 0603" 0603R 2567.63,1070.43 r270 top
RD45 "DNL, 0603" 0603R 3002.63,950.43 r180 top
RD46 "49.9, 1%, 0603" 0603R 2392.63,1015.43 r270 top
RD47 "200, 0603, 1%" 0603R 3002.63,895.43 r180 top
RD48 "25, 1%, 0603" 0603R 3719.63,986.37 r0 top
RD49 "0, 1%, 0603" 0603R 2612.63,955.43 r0 top
RD50 "DNL, 0603" 0603R 2158.63,879 r0 top
RD51 "301, 1%, 0603" 0603R 3047.63,895.43 r0 top
RD52 "49.9, 1%, 0603" 0603R 2947.63,840.43 r0 top
RD53 "100, 1%, 0603" 0603R 3047.63,840.43 r0 top
RD54 "698, 1%, 0603" 0603R 3046.63,950.43 r0 top
RD55 "806, 1%, 0603" 0603R 3455.63,892.43 r90 top
RD56 "200, 0603, 1%" 0603R 2732.63,805.43 r0 top
RD57 "49.9, 1%, 0603" 0603R 3397.63,840.43 r0 top
RD58 "0, 1%, 0603" 0603R 2157.63,824 r180 top
RD59 "10K, 1%, 0603" 0603R 3292.63,800.43 r180 top
RD60 "DNL, 0603" 0603R 2292.63,810.43 r0 top
RD61 "10K, 1%, 0603" 0603R 3347.63,2790.43 r180 top
RD62 "49.9, 1%, 0603" 0603R 2952.63,2735.43 r0 top
RD63 "49.9, 1%, 0603" 0603R 3407.63,2730.43 r0 top
RD64 "200, 0603, 1%" 0603R 2952.63,2680.43 r0 top
RD65 "100, 1%, 0603" 0603R 3107.63,2735.43 r180 top
RD66 "301, 1%, 0603" 0603R 3107.63,2680.43 r180 top
RD67 "698, 1%, 0603" 0603R 3107.63,2625.43 r180 top
RD68 "806, 1%, 0603" 0603R 3462.63,2675.43 r270 top
RD69 "0, 1%, 0603" 0603R 2617.63,2670.43 r0 top
RD70 "49.9, 1%, 0603" 0603R 2342.63,2580.43 r90 top
RD71 "0, 0603" 0603R 2397.63,2690.43 r180 top
RD72 "200, 0603, 1%" 0603R 2952.63,2625.43 r0 top
RD73 "25, 1%, 0603" 0603R 3725.63,2666 r0 top
RD74 "100, 1%, 0603" 0603R 2572.63,2690.43 r270 top
RD75 "DNL, 0603" 0603R 3007.63,2570.43 r180 top
RD76 "49.9, 1%, 0603" 0603R 2397.63,2635.43 r270 top
RD77 "200, 0603, 1%" 0603R 3007.63,2515.43 r180 top
RD78 "25, 1%, 0603" 0603R 3727.63,2475.43 r90 top
RD79 "0, 1%, 0603" 0603R 2617.63,2575.43 r0 top
RD80 "DNL, 0603" 0603R 2157.63,2497 r0 top
RD81 "301, 1%, 0603" 0603R 3052.63,2515.43 r0 top
RD82 "49.9, 1%, 0603" 0603R 2952.63,2460.43 r0 top
RD83 "100, 1%, 0603" 0603R 3052.63,2460.43 r0 top
RD84 "698, 1%, 0603" 0603R 3051.63,2570.43 r0 top
RD85 "806, 1%, 0603" 0603R 3460.63,2512.43 r90 top
RD86 "200, 0603, 1%" 0603R 2737.63,2425.43 r0 top
RD87 "49.9, 1%, 0603" 0603R 3402.63,2460.43 r0 top
RD88 "0, 1%, 0603" 0603R 2157.63,2438 r180 top
RD89 "10K, 1%, 0603" 0603R 3294.63,2419 r180 top
RD90 "DNL, 0603" 0603R 2297.63,2430.43 r0 top
RD91 "10K, 1%, 0603" 0603R 3352.63,3245.43 r180 top
RD92 "49.9, 1%, 0603" 0603R 2957.63,3190.43 r0 top
RD93 "49.9, 1%, 0603" 0603R 3412.63,3185.43 r0 top
RD94 "200, 0603, 1%" 0603R 2957.63,3135.43 r0 top
RD95 "100, 1%, 0603" 0603R 3112.63,3190.43 r180 top
RD96 "301, 1%, 0603" 0603R 3112.63,3135.43 r180 top
RD97 "698, 1%, 0603" 0603R 3112.63,3080.43 r180 top
RD98 "806, 1%, 0603" 0603R 3467.63,3130.43 r270 top
RD99 "0, 1%, 0603" 0603R 2622.63,3125.43 r0 top
RD100 "49.9, 1%, 0603" 0603R 2347.63,3035.43 r90 top
RD101 "0, 0603" 0603R 2402.63,3145.43 r180 top
RD102 "200, 0603, 1%" 0603R 2957.63,3080.43 r0 top
RD103 "25, 1%, 0603" 0603R 3733.63,3110 r0 top
RD104 "100, 1%, 0603" 0603R 2577.63,3145.43 r270 top
RD105 "DNL, 0603" 0603R 3012.63,3025.43 r180 top
RD106 "49.9, 1%, 0603" 0603R 2402.63,3090.43 r270 top
RD107 "200, 0603, 1%" 0603R 3012.63,2970.43 r180 top
RD108 "25, 1%, 0603" 0603R 3732.63,2930.43 r90 top
RD109 "0, 1%, 0603" 0603R 2622.63,3030.43 r0 top
RD110 "DNL, 0603" 0603R 2161.63,2960 r0 top
RD111 "301, 1%, 0603" 0603R 3057.63,2970.43 r0 top
RD112 "49.9, 1%, 0603" 0603R 2957.63,2915.43 r0 top
RD113 "100, 1%, 0603" 0603R 3057.63,2915.43 r0 top
RD114 "698, 1%, 0603" 0603R 3056.63,3025.43 r0 top
RD115 "806, 1%, 0603" 0603R 3465.63,2967.43 r90 top
RD116 "200, 0603, 1%" 0603R 2742.63,2880.43 r0 top
RD117 "49.9, 1%, 0603" 0603R 3407.63,2915.43 r0 top
RD118 "0, 1%, 0603" 0603R 2161.63,2905 r180 top
RD119 "10K, 1%, 0603" 0603R 3302.63,2875.43 r180 top
RD120 "DNL, 0603" 0603R 2302.63,2885.43 r0 top
RG1 "0, 0805" SM/R_0805 4278,962 r180 bottom
RP1 "200, 1%, 0603" 0603R 1074.63,629 r90 top
RP2 "200, 1%, 0603" 0603R 1089.63,859 r90 top
RP3 "200, 1%, 0603" 0603R 1094.63,1214 r90 top
RP4 "10K, 1%, 0603" 0603R 449.63,480 r270 top
RP5 "169K, 1%, 0603" 0603R 1554.63,1544 r270 bottom
RP6 "100K, 1%, 0603" 0603R 1554.63,1449 r270 bottom
RP7 "DNL, 0805" 0805R 1364.63,1509 r0 bottom
RP8 "301, 1%, 0603" 0603R 1356.63,2381 r90 bottom
RP9 "169K, 1%, 0603" 0603R 2452.63,1539 r270 top
RP10 "100K, 1%, 0603" 0603R 2397.63,1429 r0 top
RP11 "DNL, 0805" 0805R 2192.63,1369 r0 top
RP12 "301, 1%, 0603" 0603R 2402.63,1947 r270 bottom
RP13 "DNL, 0805" 0805R 564.63,3229 r270 top
RP14 "309K, 1%, 0603" 0603R 2324.63,3387 r270 bottom
RP15 "100K, 1%, 0603" 0603R 2379.63,3331 r90 bottom
RP16 "DNL, 0805" 0805R 2002.63,3449 r0 bottom
RP17 "499, 1%, 0805" 0805R 2294.63,3529 r0 bottom
RP19 "499, 1%, 0805" 0805R 2909.63,149 r0 bottom
RP20 "309K, 1%, 0603" 0603R 2514.63,318 r90 bottom
RP21 "10K, 1%, 0603" 0603R 2032.63,1374 r180 top
RP22 "100K, 1%, 0603" 0603R 2032.63,1433.37 r180 top
RP23 "10K, 1%, 0603" 0603R 1977.63,1493.37 r0 top
RP24 "100K, 1%, 0603" 0603R 2569.63,375 r270 bottom
RP25 "10K, 1%, 0603" 0603R 3697.63,1893.37 r180 top
RP26 "10K, 1%, 0603" 0603R 2095.63,1255.37 r90 top
RP27 "20K, 1%, 0603" 0603R 3775.63,1940.37 r90 top
RP28 "10K, 1%, 0603" 0603R 2037.63,1253.37 r90 top
RP29 "5K, 1%, 0603" 0603R 3793.63,1893.37 r180 top
RP30 "20K, 1%, 0603" 0603R 2150.63,1254.37 r90 top
RP31 "20K, 1%, 0603" 0603R 1977.63,1253.37 r90 top
RP32 "10K, 1%, 0603" 0603R 3697.63,1393.37 r180 top
RP33 "20K, 1%, 0603" 0603R 3782.63,1493.37 r270 top
RP34 "5K, 1%, 0603" 0603R 3797.63,1393.37 r180 top
RP35 "301, 1%, 0603" 0603R 1264.63,264 r270 bottom
RP36 "DNL, 0805" 0805R 1724.63,2909 r0 bottom
RP37 "DNL, 0805" 0805R 1710.63,2449 r0 bottom
RP38 "DNL, 0805" 0805R 1859.27,1913.37 r0 bottom
RP39 "DNL, 0805" 0805R 1730.63,834 r0 bottom
RP40 "DNL, 0805" 0805R 1731.63,388 r0 bottom
RP54 "10K, 1%, 0603" 0603R 3935,2314 r270 top
RP55 "5K, 1%, 0603" 0603R 3805,2259 r90 top
RP56 "20K, 1%, 0603" 0603R 3870,2314 r270 top
RP57 "10K, 1%, 0603" 0603R 3925,1814 r270 top
RP58 "5K, 1%, 0603" 0603R 3805,1759 r90 top
RP59 "20K, 1%, 0603" 0603R 3865,1814 r270 top
UA1 "LTC2299 ADC x2" QFN64(9X9) 1949.14,1913.64 r180 top
UA2 "AD8139_DiffAmp" SO8/L200 2942.63,2150.43 r180 top
UA3 "SN74CBT3253CPWR" TSSOP16 3182.63,1945.43 r0 top
UA4 "AD8139_DiffAmp" SO8/L200 3667.63,2165.43 r180 top
UA5 "AD8139_DiffAmp" SO8/L200 2942.63,1655.43 r180 top
UA6 "SN74CBT3253CPWR" TSSOP16 3182.63,1445.43 r0 top
UA7 "AD8139_DiffAmp" SO8/L200 3667.63,1665.43 r180 top
UD1 "LTC1668IG  DAC" SOG.65M/28/WG8.20/L10.16 1689.03,705.83 r270 top
UD2 "SN74CBT3253CPWR" SOG.65M/16/PW 3172.63,414.43 r0 top
UD3 "AD8139_DiffAmp" SO8/L200 3517.63,439.43 r0 top
UD4 "AD8022AR" SO8/L200 2877.63,629.43 r180 top
UD5 "LTC1668IG  DAC" SOG.65M/28/WG8.20/L10.16 1689.03,1151.83 r270 top
UD6 "SN74CBT3253CPWR" SOG.65M/16/PW 3172.63,860.43 r0 top
UD7 "AD8139_DiffAmp" SO8/L200 3517.63,885.43 r0 top
UD8 "AD8022AR" SO8/L200 2874.63,1074 r180 top
UD9 "LTC1668IG  DAC" SOG.65M/28/WG8.20/L10.16 1694.03,2771.83 r270 top
UD10 "SN74CBT3253CPWR" SOG.65M/16/PW 3177.63,2480.43 r0 top
UD11 "AD8139_DiffAmp" SO8/L200 3522.63,2505.43 r0 top
UD12 "AD8022AR" SO8/L200 2879.63,2694 r180 top
UD13 "LTC1668IG  DAC" SOG.65M/28/WG8.20/L10.16 1699.03,3226.83 r270 top
UD14 "SN74CBT3253CPWR" SOG.65M/16/PW 3182.63,2935.43 r0 top
UD15 "AD8139_DiffAmp" SO8/L200 3527.63,2960.43 r0 top
UD16 "AD8022AR" SO8/L200 2884.63,3149 r180 top
UP1 "LT1962EMS8" MSOP-8 1489.63,1449 r270 bottom
UP2 "LT1962EMS8" MSOP-8 2332.63,1424 r90 top
UP3 "LT1962EMS8" MSOP-8 2192.63,3389 r270 bottom
UP5 "ADC128S102 ADC 8Ch" TSSOP16 1755.93,1245.8 r0 top
UP6 "ADT7301 TempSensor" SOT23-6 1712.63,1318.37 r90 top
UP7 "LT1962EMS8" SO8/L200 2454.63,104 r90 bottom
UT31 "SN74AVCB164245 Transceiver" TSSOP48_.4MMPITCH_NARROW 1188.63,2603.37 r90 bottom
UT32 "SN74AVCB164245 Transceiver" TSSOP48_.4MMPITCH_NARROW 1189.63,553.37 r90 bottom
UT35 "SN74AVCB164245 Transceiver" TSSOP48_.4MMPITCH_NARROW 1188.63,1784.37 r90 bottom
UT40 "SN74AVCB164245 Transceiver" TSSOP48_.4MMPITCH_NARROW 1187.63,962.37 r90 bottom
UT45 "SN74AVCB164245 Transceiver" TSSOP48_.4MMPITCH_NARROW 1189.63,3015.37 r90 bottom
UT50 "SN74AVCB164245 Transceiver" TSSOP48_.4MMPITCH_NARROW 1188.63,2193.37 r90 bottom
UT55 "SN74AVCB164245 Transceiver" TSSOP48_.4MMPITCH_NARROW 1189.63,1374.37 r90 bottom
UT60 "SN74AVCB164245 Transceiver" TSSOP48_.4MMPITCH_NARROW 1188.63,3428.37 r90 bottom
UT61 "22ohm Resistor array Y1220CT-ND Panasonic" RN8.150X63 820.13,950.37 r90 bottom
UT62 "22ohm Resistor array Y1220CT-ND Panasonic" RN8.150X63 820.13,755.37 r90 bottom
UT63 "22ohm Resistor array Y1220CT-ND Panasonic" RN8.150X63 815.13,1360.37 r90 bottom
UT64 "22ohm Resistor array Y1220CT-ND Panasonic" RN8.150X63 815.13,1165.37 r90 bottom
UT65 "22ohm Resistor array Y1220CT-ND Panasonic" RN8.150X63 815.13,3002.37 r90 bottom
UT66 "22ohm Resistor array Y1220CT-ND Panasonic" RN8.150X63 815.13,2810.37 r90 bottom
UT67 "22ohm Resistor array Y1220CT-ND Panasonic" RN8.150X63 815.13,3415.37 r90 bottom
UT68 "22ohm Resistor array Y1220CT-ND Panasonic" RN8.150X63 815.13,3220.37 r90 bottom
UT69 "22ohm Resistor array Y1220CT-ND Panasonic" RN8.150X63 815.13,2180.37 r90 bottom
UT70 "22ohm Resistor array Y1220CT-ND Panasonic" RN8.150X63 815.13,1985.37 r90 bottom
UT71 "22ohm Resistor array Y1220CT-ND Panasonic" RN8.150X63 815.13,1770.37 r90 bottom
UT72 "22ohm Resistor array Y1220CT-ND Panasonic" RN8.150X63 815.13,1575.37 r90 bottom
UT73 "22ohm Resistor array Y1220CT-ND Panasonic" RN8.150X63 819.13,540.37 r90 bottom
UT74 "22ohm Resistor array Y1220CT-ND Panasonic" RN8.150X63 815.13,2398.37 r90 bottom
UT75 "22ohm Resistor array Y1220CT-ND Panasonic" RN8.150X63 815.13,2590.37 r90 bottom

## Footprints (in the part's own frame and the unit in brackets; to place one, negate y for a bottom-side part, rotate by r counter-clockwise, add the part's x,y. Pads: shape width x height; smd on the part's side, far side on the other; paste and mask are expansions set on the pad)
0603C [mil]
  rect 32x32 smd: 1(-0.4,-0.25) 2(55.6,-0.25)
  silkscreen extent 19,-15 37,14
0603C_REV1 [mil]
  rect 32x32 smd: 1(-0.4,0.18) 2(55.6,0.18)
  silkscreen extent 19,-15 37,14
0603R [mil]
  rect 32x32 smd: 1(-0.26,0.12) 2(55.74,0.12)
  silkscreen extent 19,-15 37,14
0805C [mil]
  rect 50x50 smd: 1(-0.4,-0.25) 2(83.6,-0.25)
  silkscreen extent 31,-20 52,20
0805L [mil]
  rect 50x50 smd: 1(-0.4,0.18) 2(83.6,0.18)
  silkscreen extent 31,-20 52,20
0805R [mil]
  rect 50x50 smd: 1(-0.4,-0.25) 2(83.6,-0.25)
  silkscreen extent 31,-20 52,20
BLKCON.100/VH/TM1SQS/W.100/2 [mil]
  round 62 hole 42: 1(-0.4,-0.25) 2(99.6,-0.25)
  silkscreen extent -55,-50 155,50
CHOKEPM54 [mil]
  rect 118.1x216.53 smd: 1(-0.4,0.12) 2(196.27,0.12)
  silkscreen extent 19,-114 204,114
CON_AMP_1MM_64PINS [mil]
  rect 23.6x106.3 smd: 1(-0.4,0.18) 2(-0.4,-129.73) 3(-39.77,0.18) 4(-39.77,-129.73) 5(-79.13,0.18) 6(-79.13,-129.73) 7(-118.5,0.18) 8(-118.5,-129.73) 9(-157.87,0.18) 10(-157.87,-129.73) 11(-197.23,0.18) 12(-197.23,-129.73) 13(-236.6,0.18) 14(-236.6,-129.73) 15(-275.97,0.18) 16(-275.97,-129.73) 17(-315.33,0.18) 18(-315.33,-129.73) 19(-354.7,0.18) 20(-354.7,-129.73) 21(-394.07,0.18) 22(-394.07,-129.73) 23(-433.43,0.18) 24(-433.43,-129.73) 25(-472.8,0.18) 26(-472.8,-129.73) 27(-512.17,0.18) 28(-512.17,-129.73) 29(-551.53,0.18) 30(-551.53,-129.73) 31(-590.9,0.18) 32(-590.9,-129.73) 33(-630.27,0.18) 34(-630.27,-129.73) 35(-669.63,0.18) 36(-669.63,-129.73) 37(-709,0.18) 38(-709,-129.73) 39(-748.37,0.18) 40(-748.37,-129.73) 41(-787.73,0.18) 42(-787.73,-129.73) 43(-827.1,0.18) 44(-827.1,-129.73) 45(-866.47,0.18) 46(-866.47,-129.73) 47(-905.83,0.18) 48(-905.83,-129.73) 49(-945.2,0.18) 50(-945.2,-129.73) 51(-984.57,0.18) 52(-984.57,-129.73) 53(-1023.93,0.18) 54(-1023.93,-129.73) 55(-1063.3,0.18) 56(-1063.3,-129.73) 57(-1102.67,0.18) 58(-1102.67,-129.73) 59(-1142.03,0.18) 60(-1142.03,-129.73) 61(-1181.4,0.18) 62(-1181.4,-129.73) 63(-1220.77,0.18) 64(-1220.77,-129.73)
  round 56 hole 55 unplated: HOLE1(-1287.8,-64.72) HOLE2(66.52,-64.77)
  silkscreen extent -1320,-198 98,71
CON_AMP_1MM_84PINS [mil]
  rect 23.6x106.3 smd: 1(-0.4,0.12) 2(-0.4,-129.8) 3(-39.77,0.12) 4(-39.77,-129.8) 5(-79.13,0.12) 6(-79.13,-129.8) 7(-118.5,0.12) 8(-118.5,-129.8) 9(-157.87,0.12) 10(-157.87,-129.8) 11(-197.23,0.12) 12(-197.23,-129.8) 13(-236.6,0.12) 14(-236.6,-129.8) 15(-275.97,0.12) 16(-275.97,-129.8) 17(-315.33,0.12) 18(-315.33,-129.8) 19(-354.7,0.12) 20(-354.7,-129.8) 21(-394.07,0.12) 22(-394.07,-129.8) 23(-433.43,0.12) 24(-433.43,-129.8) 25(-472.8,0.12) 26(-472.8,-129.8) 27(-512.17,0.12) 28(-512.17,-129.8) 29(-551.53,0.12) 30(-551.53,-129.8) 31(-590.9,0.12) 32(-590.9,-129.8) 33(-630.27,0.12) 34(-630.27,-129.8) 35(-669.63,0.12) 36(-669.63,-129.8) 37(-709,0.12) 38(-709,-129.8) 39(-748.37,0.12) 40(-748.37,-129.8) 41(-787.73,0.12) 42(-787.73,-129.8) 43(-827.1,0.12) 44(-827.1,-129.8) 45(-866.47,0.12) 46(-866.47,-129.8) 47(-905.83,0.12) 48(-905.83,-129.8) 49(-945.2,0.12) 50(-945.2,-129.8) 51(-984.57,0.12) 52(-984.57,-129.8) 53(-1023.93,0.12) 54(-1023.93,-129.8) 55(-1063.3,0.12) 56(-1063.3,-129.8) 57(-1102.67,0.12) 58(-1102.67,-129.8) 59(-1142.03,0.12) 60(-1142.03,-129.8) 61(-1181.4,0.12) 62(-1181.4,-129.8) 63(-1220.77,0.12) 64(-1220.77,-129.8) 65(-1260.13,0.12) 66(-1260.13,-129.8) 67(-1299.5,0.12) 68(-1299.5,-129.8) 69(-1338.87,0.12) 70(-1338.87,-129.8) 71(-1378.23,0.12) 72(-1378.23,-129.8) 73(-1417.6,0.12) 74(-1417.6,-129.8) 75(-1456.97,0.12) 76(-1456.97,-129.8) 77(-1496.33,0.12) 78(-1496.33,-129.8) 79(-1535.7,0.12) 80(-1535.7,-129.8) 81(-1575.07,0.12) 82(-1575.07,-129.8) 83(-1614.43,0.12) 84(-1614.43,-129.8)
  round 56 hole 55 unplated: HOLE1(-1681.5,-64.83) HOLE2(66.52,-64.83)
  silkscreen extent -1711,-199 98,71
DSUB/RS.318/TM/15 [mil]
  rect 63x63 hole 42: 1(0.47,0.25) 10(163.97,112.25)
  round 63 hole 42: 2(109.47,0.25) 3(218.47,0.25) 4(327.47,0.25) 5(436.47,0.25) 6(545.47,0.25) 7(654.47,0.25) 8(763.47,0.25) 9(54.97,112.25) 11(272.97,112.25) 12(381.97,112.25) 13(490.97,112.25) 14(599.97,112.25) 15(708.97,112.25)
  round 120 hole 120: Hole29(1037.97,56.25) Hole30(-274.03,56.25)
  silkscreen extent -406,-75 1169,662
HEADER_AMP146128 [mil]
  rect 50x140 smd: 1(0.24,-0.38) 2(100.24,-105.38)
  silkscreen extent -25,-100 125,-10
MSOP-8 [mil]
  rect 16x68.87 smd: 1(-0.4,-0.25)
  oval 16x68.87 smd: 2(25.2,-0.25) 3(50.8,-0.25) 4(76.4,-0.25) 5(76.35,192.65) 6(50.77,192.65) 7(25.18,192.65) 8(-0.4,192.65)
  silkscreen extent -20,43 98,151
MTHOLE.125 [mil]
  round 125 hole 125 unplated: 1(-0.4,-0.25)
QFN64(9X9) [mil]
  rect 26x10 smd: 1(-174.11,148.03) 2(-174.11,128.34) 3(-174.11,108.66) 4(-174.11,88.97) 5(-174.11,69.29) 6(-174.11,49.6) 7(-174.11,29.92) 8(-174.11,10.23) 9(-174.11,-9.45) 10(-174.11,-29.14) 11(-174.11,-48.82) 12(-174.11,-68.51) 13(-174.11,-88.19) 14(-174.11,-107.88) 15(-174.11,-127.56) 16(-174.11,-147.25) 33(174.32,-147.25) 34(174.32,-127.56) 35(174.32,-107.88) 36(174.32,-88.19) 37(174.32,-68.51) 38(174.32,-48.82) 39(174.32,-29.14) 40(174.32,-9.45) 41(174.32,10.23) 42(174.32,29.92) 43(174.32,49.6) 44(174.32,69.29) 45(174.32,88.97) 46(174.32,108.66) 47(174.32,128.34) 48(174.32,148.03)
  rect 10x26 smd: 17(-147.53,-173.82) 18(-127.85,-173.82) 19(-108.16,-173.82) 20(-88.48,-173.82) 21(-68.79,-173.82) 22(-49.11,-173.82) 23(-29.42,-173.82) 24(-9.74,-173.82) 25(9.95,-173.82) 26(29.63,-173.82) 27(49.32,-173.82) 28(69,-173.82) 29(88.69,-173.82) 30(108.37,-173.82) 31(128.06,-173.82) 32(147.74,-173.82) 49(147.74,174.6) 50(128.06,174.6) 51(108.37,174.6) 52(88.69,174.6) 53(69,174.6) 54(49.32,174.6) 55(29.63,174.6) 56(9.95,174.6) 57(-9.74,174.6) 58(-29.42,174.6) 59(-49.11,174.6) 60(-68.79,174.6) 61(-88.48,174.6) 62(-108.16,174.6) 63(-127.85,174.6) 64(-147.53,174.6)
  rect 281.5x281.5 smd: 65(0.1,0.39)
  silkscreen extent -177,-177 177,178
RN8.150X63 [mil]
  rect 16x32 smd: 1(0.1,0.12) 8(-143.9,0.12) 9(-143.9,-70.88) 16(0.1,-70.88)
  rect 10x32 smd: 2(-22.9,0.12) 3(-42.9,0.12) 4(-61.9,0.12) 5(-81.9,0.12) 6(-101.9,0.12) 7(-120.9,0.12) 10(-120.9,-70.88) 11(-101.9,-70.88) 12(-81.9,-70.88) 13(-61.9,-70.88) 14(-42.9,-70.88) 15(-22.9,-70.88)
  silkscreen extent -156,-46 11,-24
"SHIELD 2.75X3.00" [mil]
  rect 210x75 smd: 1(380.2,37) 2(880.2,37) 3(1380.2,37) 4(1880.2,37) 5(2380.2,37) 6(2880.2,37) 12(2880.2,-2800) 13(2380.2,-2800) 14(1880.2,-2800) 15(1380.2,-2800) 16(880.2,-2800) 17(380.2,-2800)
  rect 75x210 smd: 7(3048.7,-381.5) 8(3048.7,-881.5) 9(3048.7,-1381.5) 10(3048.7,-1881.5) 11(3048.7,-2381.5) 18(-38.3,-2631.5) 19(-38.3,-2131.5) 20(-38.3,-1631.5) 21(-38.3,-1131.5) 22(-38.3,-631.5) 23(-38.3,-131.5)
SM/R_0805 [mil]
  rect 50x50 smd: 1(-0.03,-0.25) 2(-84.03,-0.25)
  silkscreen extent -122,-38 38,37
SO8/L200 [mil]
  rect 25x94 smd: 1(-0.4,0.18)
  oval 25x94 smd: 2(49.6,0.18) 3(99.6,0.18) 4(149.6,0.18) 5(149.6,196.18) 6(99.6,196.18) 7(49.6,196.18) 8(-0.4,196.18)
  silkscreen extent -23,61 174,136
SOG.65M/16/PW [mil]
  rect 16x70 smd: 1(-0.4,0.18)
  oval 16x70 smd: 2(25.2,0.18) 3(50.8,0.18) 4(76.4,0.18) 5(102,0.18) 6(127.6,0.18) 7(153.2,0.18) 8(178.68,0.18) 9(178.68,238.77) 10(153.1,238.77) 11(127.52,238.77) 12(101.93,238.77) 13(76.35,238.77) 14(50.77,238.77) 15(25.18,238.77) 16(-0.4,238.77)
  silkscreen extent -16,36 192,205
SOG.65M/28/WG8.20/L10.16 [mil]
  rect 16x90 smd: 1(0,-0.42) 10(230.4,-0.42) 20(204.8,269.58)
  oval 16x90 smd: 2(25.6,-0.42) 3(51.2,-0.42) 4(76.8,-0.42) 5(102.4,-0.42) 6(128,-0.42) 7(153.6,-0.42) 8(179.2,-0.42) 9(204.8,-0.42) 11(256,-0.42) 12(281.6,-0.42) 13(307.2,-0.42) 14(332.8,-0.42) 15(332.8,269.58) 16(307.2,269.58) 17(281.6,269.58) 18(256,269.58) 19(230.4,269.58) 21(179.2,269.58) 22(153.6,269.58) 23(128,269.58) 24(102.4,269.58) 25(76.8,269.58) 26(51.2,269.58) 27(25.6,269.58) 28(0,269.58)
  silkscreen extent -34,60 366,210
SOT23-6 [mil]
  rect 27x39 smd: 1(-0.4,0.12) 2(37.1,0.12) 3(74.6,0.12) 4(74.6,102.12) 5(37,102.12) 6(-0.4,102.08)
  silkscreen extent -22,26 97,79
TANT4532 [mil]
  rect 80x120 smd: 1(-0.4,0.12) 2(179.6,0.12)
  silkscreen extent -83,-67 228,102
TANTA [mil]
  rect 60x60 smd: 1(-0.4,0.18) 2(129.6,0.18)
  silkscreen extent -13,-60 95,25
TSSOP16 [mil]
  rect 16x70.47 smd: 1(-0.1,-0.45)
  oval 16x70.47 smd: 2(25.5,-0.45) 3(51.1,-0.45) 4(76.7,-0.45) 5(102.3,-0.45) 6(127.9,-0.45) 7(153.5,-0.45) 8(179.03,-0.45) 9(179.03,233.8) 10(153.45,233.8) 11(127.85,233.8) 12(102.27,233.8) 13(76.67,233.8) 14(51.08,233.8) 15(25.48,233.8) 16(-0.1,233.8)
  silkscreen extent -12,43 185,192
TSSOP48_.4MMPITCH_NARROW [mil]
  rect 9x68 smd: 1(-0.4,0.25) 10(-141.7,0.25) 20(-298.7,0.25)
  oval 9x68 smd: 2(-16.1,0.25) 3(-31.8,0.25) 4(-47.5,0.25) 5(-63.2,0.25) 6(-78.9,0.25) 7(-94.6,0.25) 8(-110.3,0.25) 9(-126,0.25) 11(-157.4,0.25) 12(-173.1,0.25) 13(-188.8,0.25) 14(-204.5,0.25) 15(-220.2,0.25) 16(-235.9,0.25) 17(-251.6,0.25) 18(-267.3,0.25) 19(-283,0.25) 21(-314.4,0.25) 22(-330.1,0.25) 23(-345.8,0.25) 24(-361.5,0.25) 25(-361.5,-212.35) 26(-345.8,-212.35) 27(-330.1,-212.35) 28(-314.4,-212.35) 29(-298.7,-212.35) 31(-267.3,-212.35) 32(-251.6,-212.35) 33(-235.9,-212.35) 34(-220.2,-212.35) 35(-204.5,-212.35) 36(-188.8,-212.35) 37(-173.1,-212.35) 38(-157.4,-212.35) 39(-141.7,-212.35) 41(-110.3,-212.35) 42(-94.6,-212.35) 43(-78.9,-212.35) 44(-63.2,-212.35) 45(-47.5,-212.35) 46(-31.8,-212.35) 47(-16.1,-212.35) 48(-0.4,-212.35)
  rect 10x68 smd: 30(-283,-212.35) 40(-126,-212.35)
  silkscreen extent -374,-161 11,-55

## Free pads (board coordinates)
  round 25 hole 12: 1(114.33,3353.43) 1(404.85,3353.43) 1(1275.63,1850) 1(1292.63,2208) 1(1304.63,208) 1(1356.63,2492) 1(1943.27,1855.87) 1(1943.27,1970.87) 1(1988.51,1788.64) 1(2067.25,1825.06) 1(2067.25,2002.22) 1(2666.63,865.43) 1(2907.63,867) 1(2907.63,970.43) 1(2939.63,792) 1(3517,2302)

## Via types
v1: diameter 25, hole 12, Top Layer to Bottom Layer, 692 vias
v2: diameter 40, hole 20, Top Layer to Bottom Layer, 39 vias
v3: diameter 35, hole 20, Top Layer to Bottom Layer, 23 vias
v4: diameter 22, hole 12, Top Layer to Bottom Layer, 3 vias

## Nets (pads, with @x,y where several pads share a name; then routed paths per layer and width w, separated by ;. In a path a pad name is that pad's centre, name@x,y a point inside that pad or via, vN(x,y) a via of type N, cw(c..) or ccw(c..) an arc to the next point about the centre after c; other vN are vias at no path point)
A15: 
A15_11102: 
B15: 
B15_11282: 
CLOCK_IN1: J3.43 UT75.12 | length 739.8
  Top Layer w7: v1(114.33,2526.73) J3.43@194.63,2526.73
  Bottom Layer w7: v1(114.33,2526.73) 403,2526.73 419.63,2542.37 429.63,2553.37 482.63,2553.37 527.63,2508.37 UT75.12@744.13,2508.37
CLOCK_IN2: J3.44 UT75.11 | length 437.5
  Top Layer w7: J3.44@324.55,2526.73 452.87,2526.73 v1(453.63,2527.5)
  Bottom Layer w7: v1(453.63,2527.5) 453.63,2528 454.63,2528 454.63,2528.5 484.5,2528.5 524.63,2488.37 UT75.11@744.13,2488.37
COMB1_DATA0: J5.49 UT61.16 | length 745.8
  Top Layer w7: v1(114.33,963.57) J5.49@194.63,963.57
  Bottom Layer w7: v1(114.33,963.57) 129.63,978.87 434.5,978.87 449.63,994 619.63,994 663.27,950.37 UT61.16@749.13,950.37
COMB1_DATA1: J5.50 UT61.15 | length 439.8
  Top Layer w7: J5.50@324.55,963.57 453.33,963.57 453.63,963.87 v1(454.63,963.87)
  Bottom Layer w7: v1(454.63,963.87) 624.77,963.87 661.27,927.37 UT61.15@749.13,927.37
COMB1_DATA2: J5.51 UT61.14 | length 839.9
  Top Layer w7: v1(65.55,923.43) 66.32,924.2 J5.51@194.63,924.2
  Bottom Layer w7: v1(65.55,923.43) 231.2,923.43 255.63,947.87 416.63,947.87 425.63,938.87 619.5,938.87 651,907.37 UT61.14@749.13,907.37
COMB1_DATA3: J5.52 UT61.13 | length 439.4
  Top Layer w7: J5.52@324.55,924.2 v1(404.85,924.2)
  Bottom Layer w7: v1(404.85,924.2) 604.43,924.2 640.27,888.37 UT61.13@749.13,888.37
COMB1_DATA4: J5.53 UT61.12 | length 743.5
  Top Layer w7: v1(114.33,884.83) J5.53@194.63,884.83
  Bottom Layer w7: v1(114.33,884.83) 115.3,883.87 176.63,883.87 186.63,893.87 416.63,893.87 432.63,909.87 593.77,909.87 635.27,868.37 UT61.12@749.13,868.37